# Altium PCB Full_Bridge_Converter.PcbDoc (part 1 of 3)
Units mm, origin at the board's own origin, x right, y up, seen from the top; angles counter-clockwise.
Board outline 225.68 x 119 mm, 4 copper layers (Top Layer, GND, PWD, Bottom Layer), stack 2.398 mm thick; 171 components, 54 nets, 388 pads, 114 vias.
Unrouted connection lines stored in the file: 10.
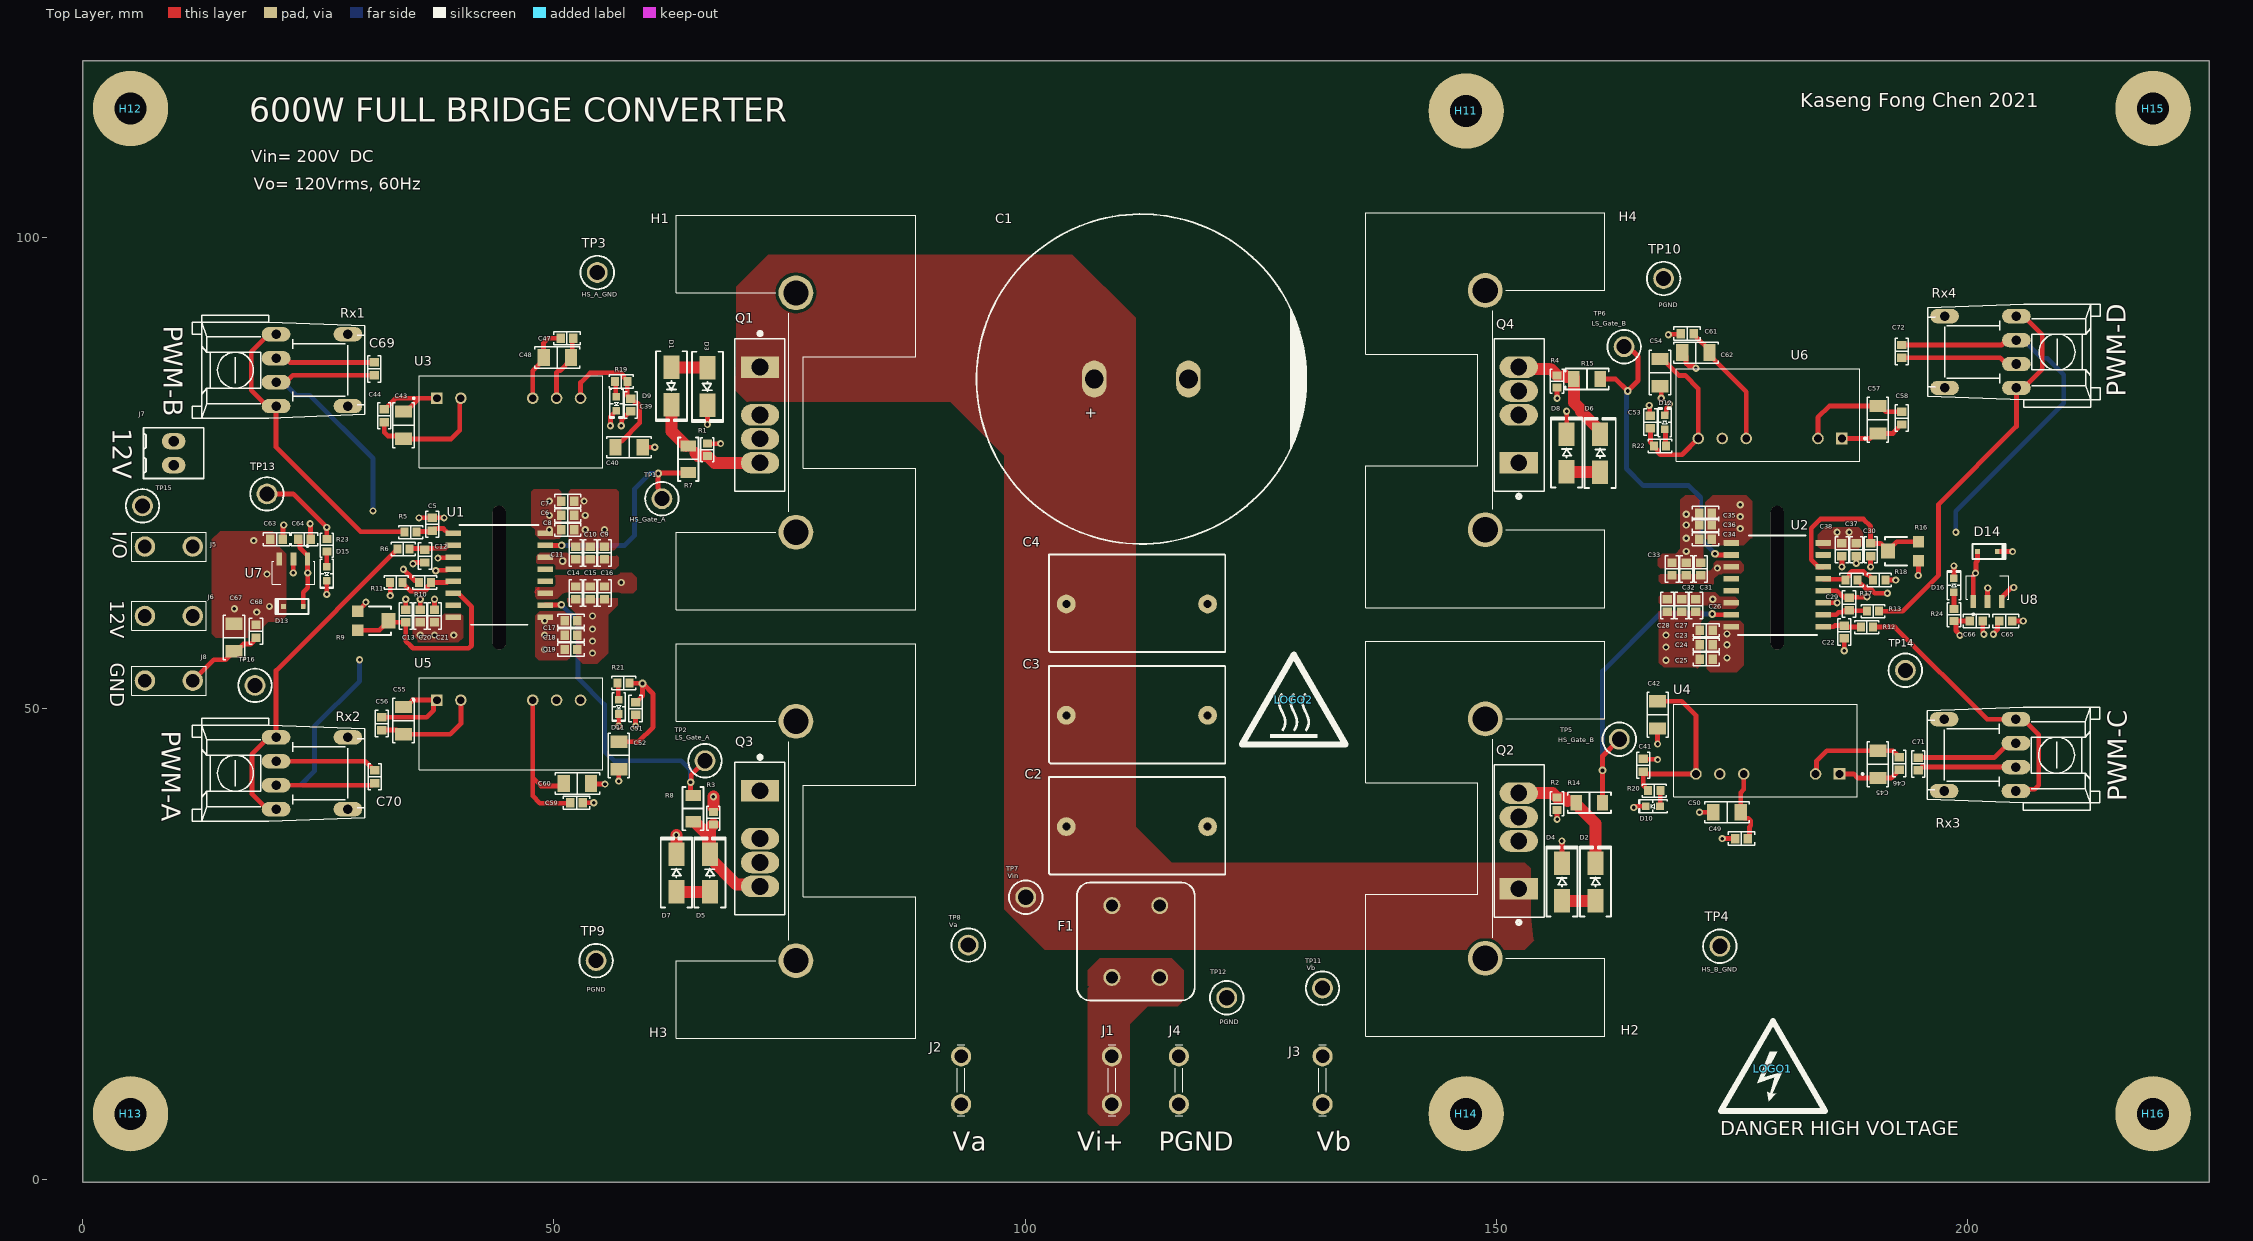
[diagram p0: Top Layer view]
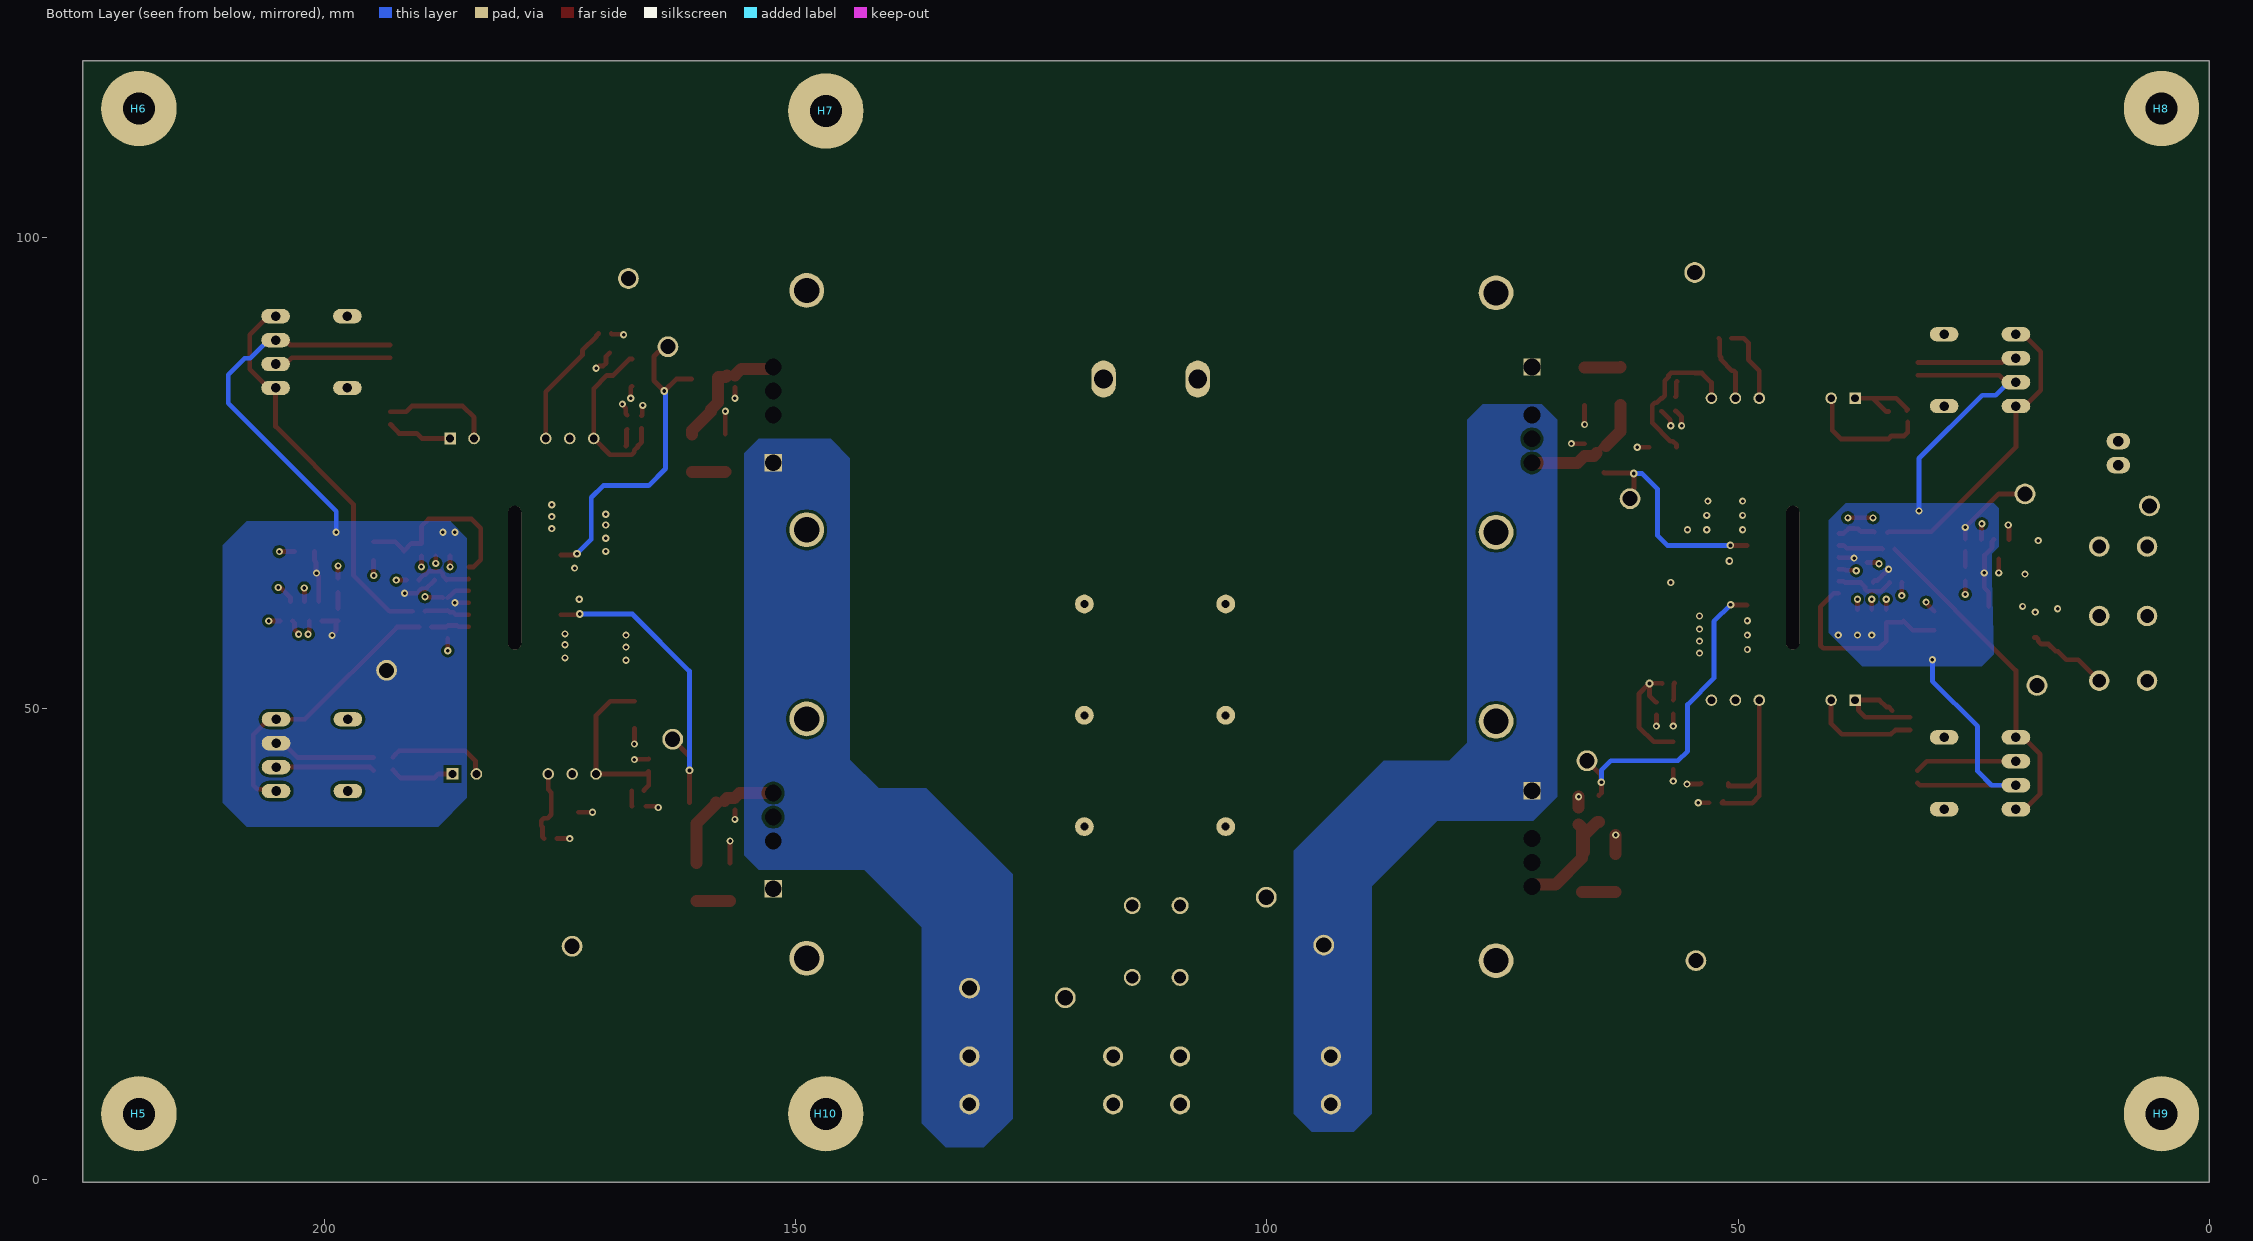
[diagram p1: Bottom Layer view, seen from below]
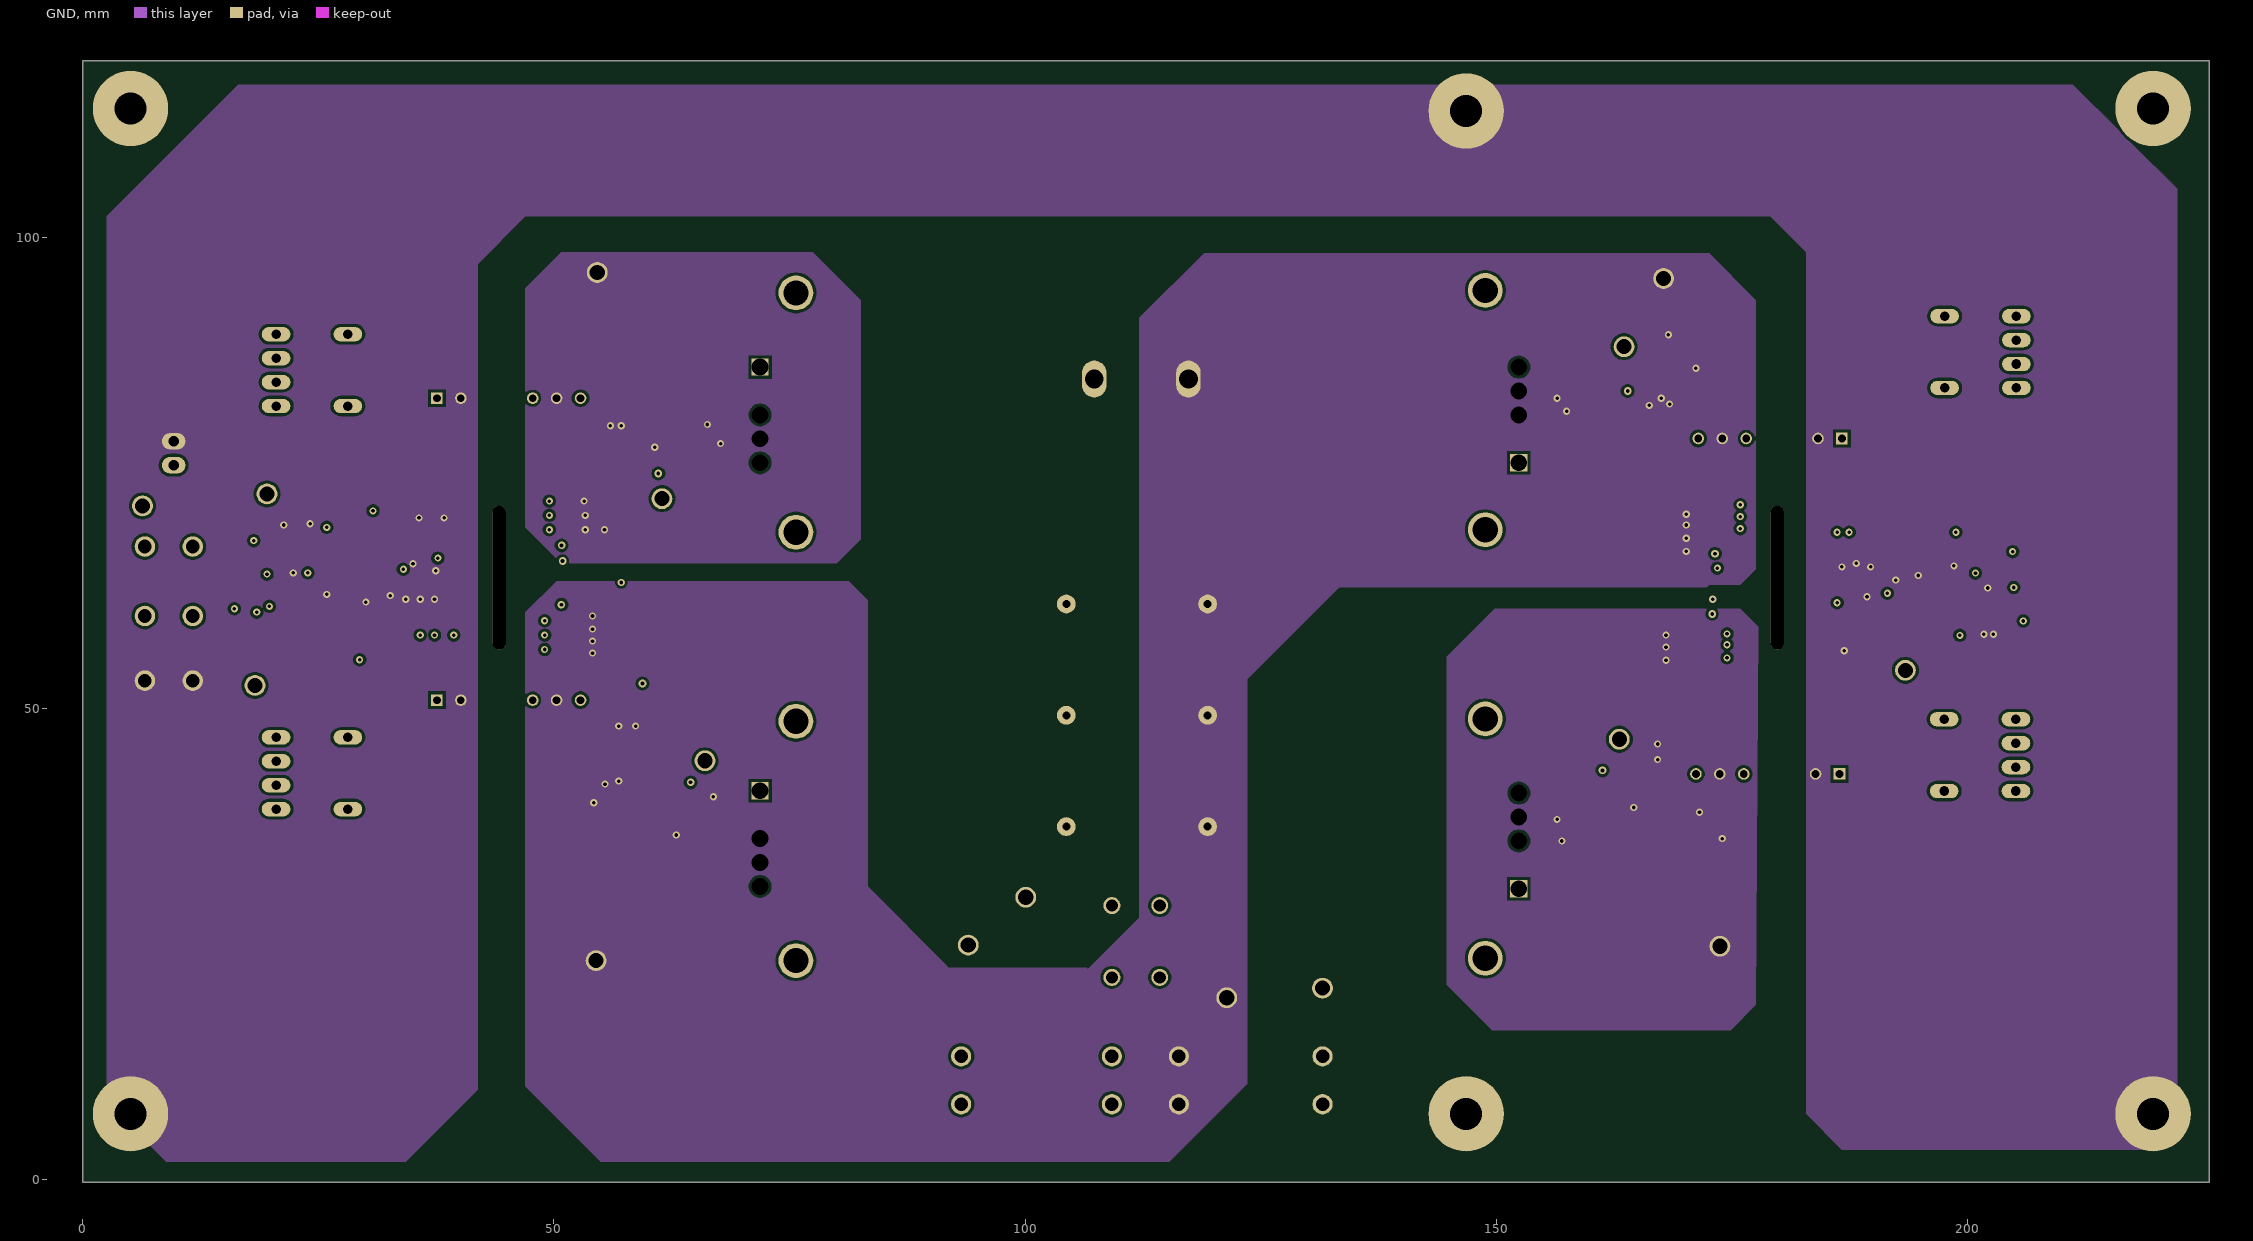
[diagram p2: GND]
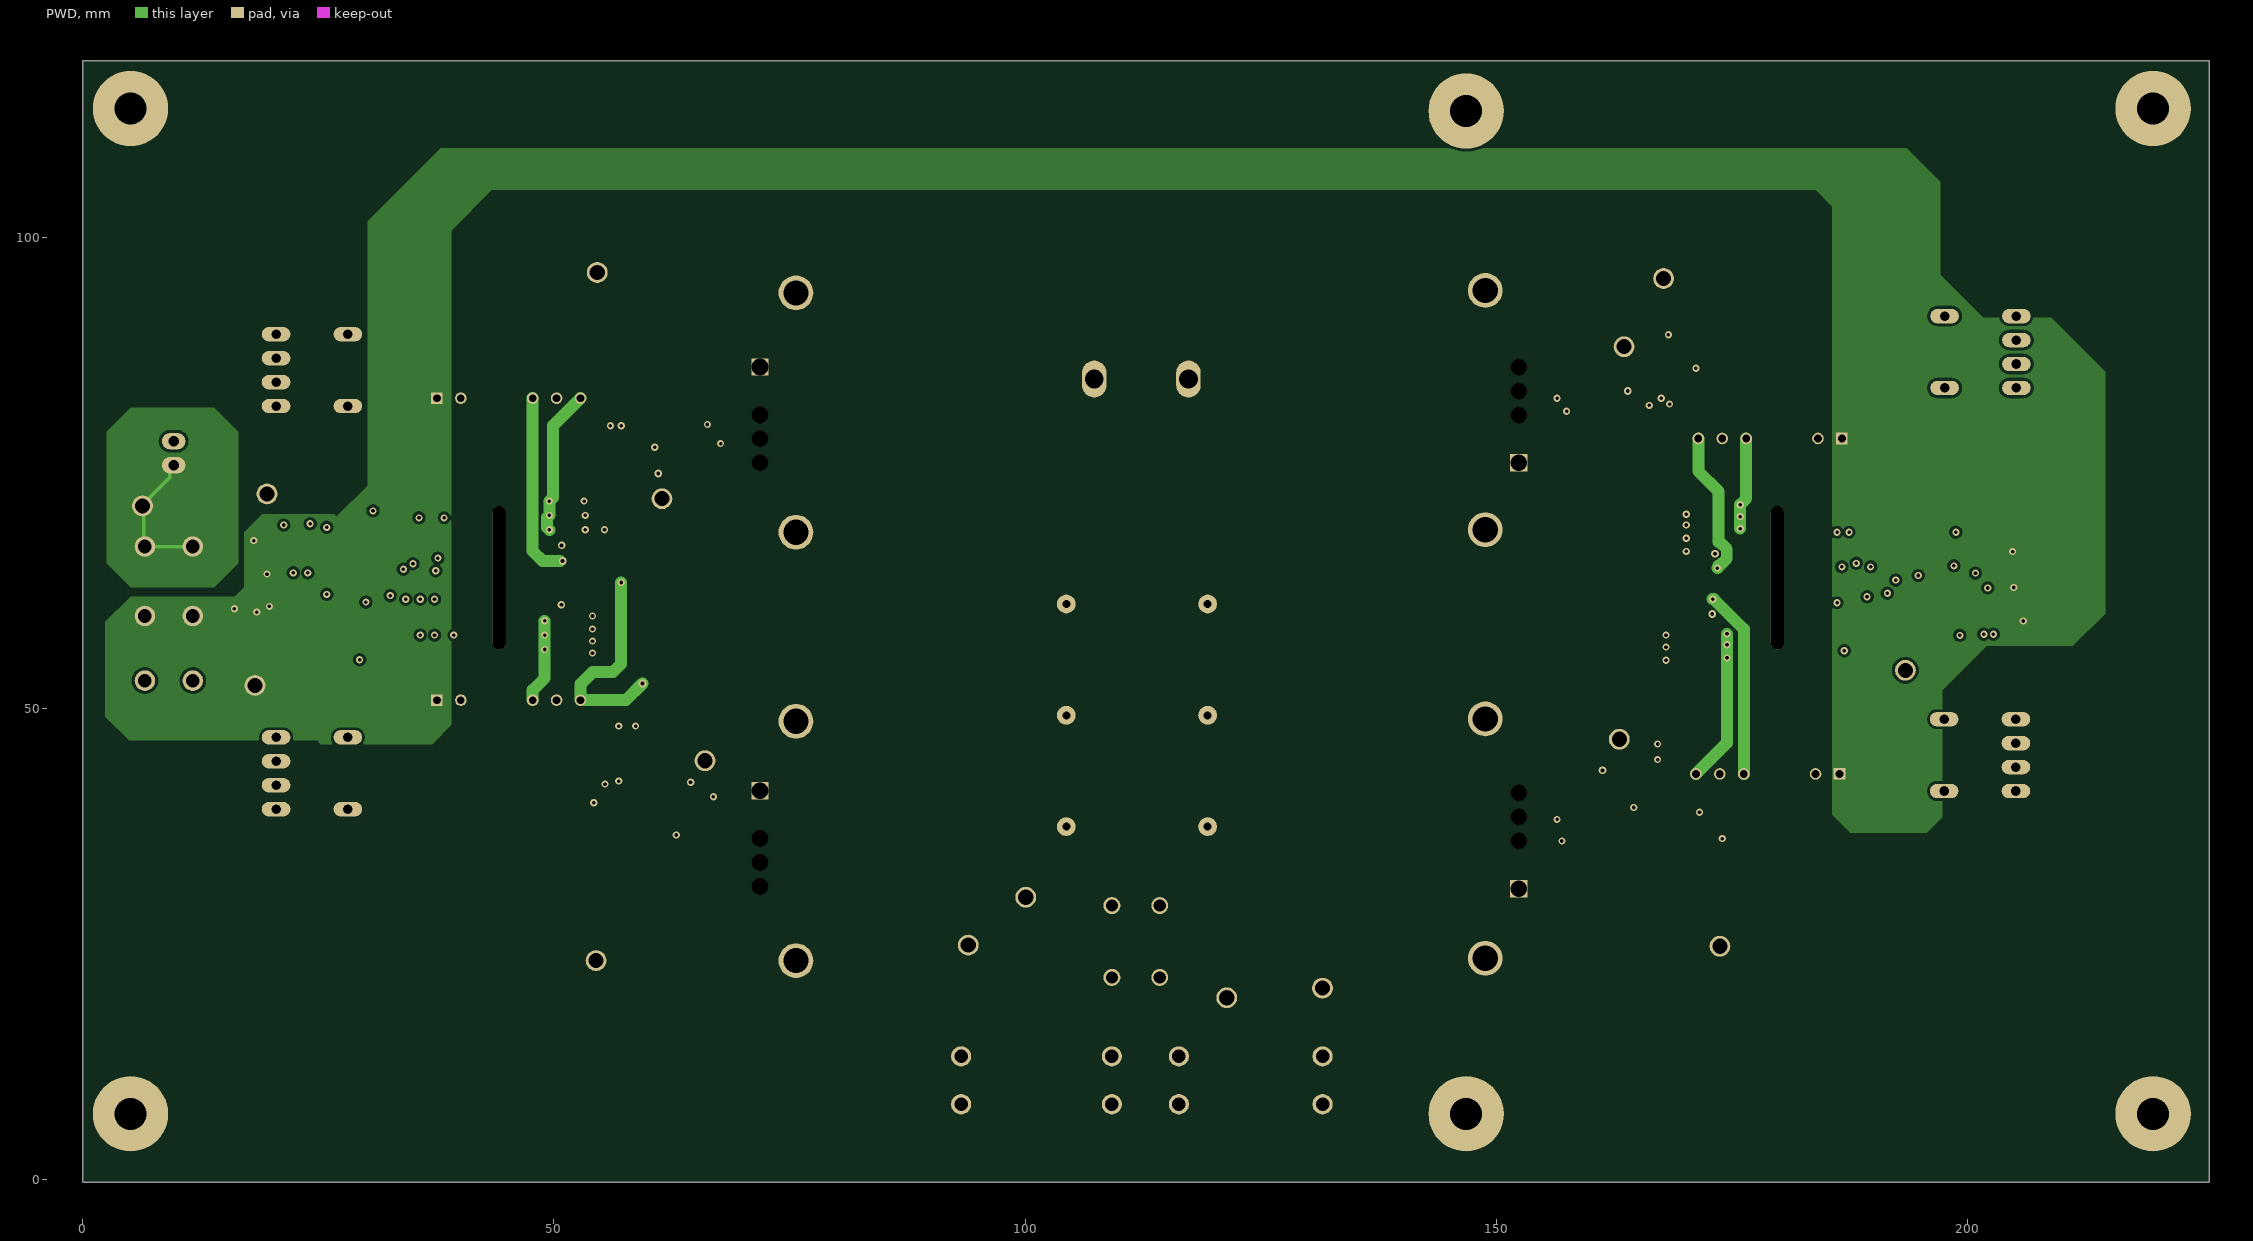
[diagram p3: PWD]
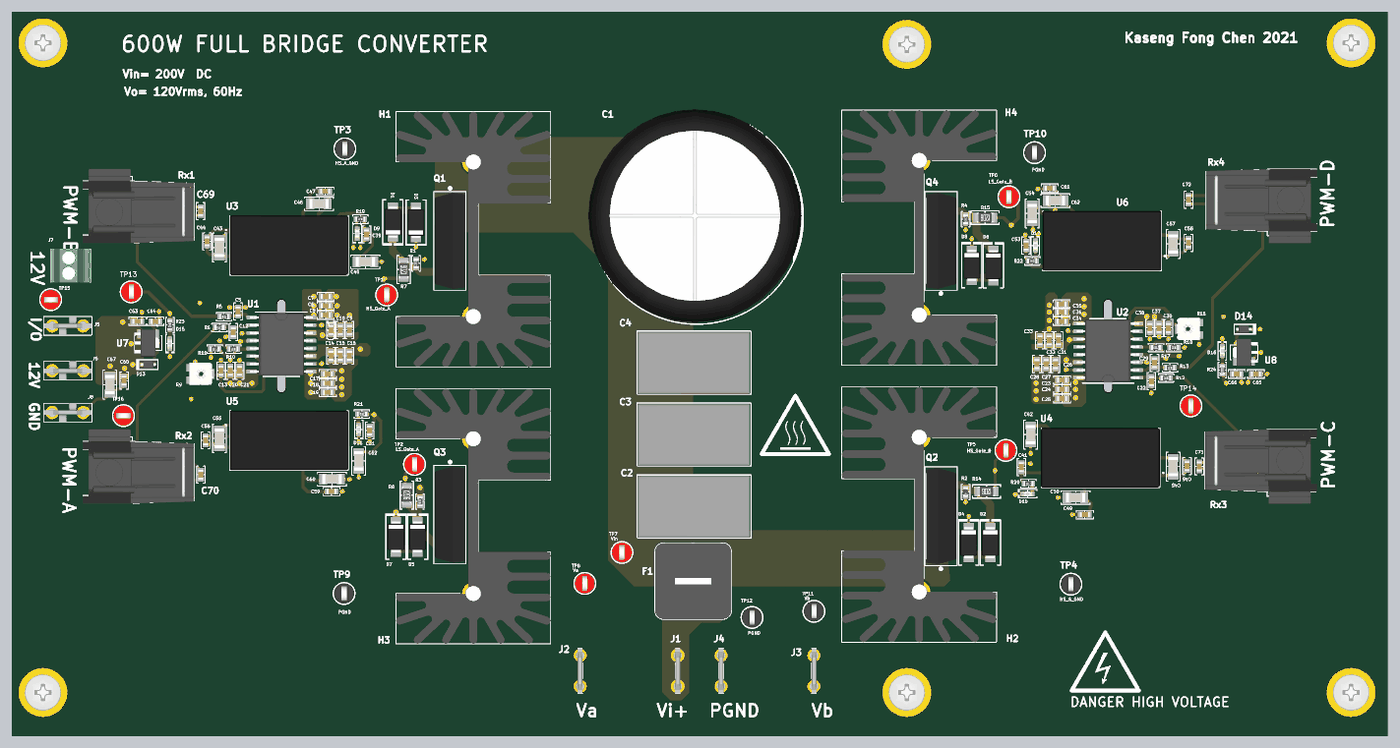
[diagram p5: 3D render of the assembled board from above, using the file's embedded part models]

## Layer stack, top to bottom
Top Solder: solder mask 0.0102, Solder Resist, Dk 3.5
Top Layer: signal copper 0.0711
Dielectric 2: prepreg 0.3048, FR-4-High Tg, Dk 4.1
GND: signal copper 0.0711
Dielectric 1: core 1.5037, FR-4-High Tg, Dk 4.8
PWD: signal copper 0.0711
Dielectric 3: prepreg 0.3048, FR-4-High Tg, Dk 4.1
Bottom Layer: signal copper 0.0711
Bottom Solder: solder mask 0.0102, Solder Resist, Dk 3.5

## Board outline
0,-0.254 225.679,-0.254 225.679,118.745 0,118.745

## Design rules (kind name [scope] priority, off if disabled: settings)
AcuteAngle [All] p1: minimum=4.50000000000000E+0001 checktracksonly=FALSE
AssemblyTestPointUsage [All] p1: valid=2
BoardOutlineClearance BoardOutlineClearance_MountingHoles [OnCopper and InComponentClass('Mounting Holes')] p1: gap=1.016 ignorepadtopadclearanceinfootprint=FALSE
BoardOutlineClearance BoardOutlineClearance_Poly [OnCopper and IsPoly] p2: gap=0.635 ignorepadtopadclearanceinfootprint=FALSE
BoardOutlineClearance [OnCopper and Not InComponentClass('Logo') and not InComponentClass('FiducialMark') and not InRegion(1000,500,4000,800) and not InPoly] p3: gap=0 ignorepadtopadclearanceinfootprint=FALSE
Clearance Clearance_MH [InPadClass('mh')] p1: gap=1.5 ignorepadtopadclearanceinfootprint=FALSE except(0: Arc-Hole Track-Hole SMDPad-Hole THPad-Hole Via-Hole Fill-Hole Poly-Hole Region-Hole Text-Hole)
Clearance Clearance_HV_Bottom_Layer [InLayerClass('Bottom_Layer') and InPolygon vs InNetClass('HV_Class')] p2: gap=3 ignorepadtopadclearanceinfootprint=FALSE except(0: Arc-Hole Track-Hole SMDPad-Hole THPad-Hole Via-Hole Fill-Hole Poly-Hole Region-Hole Text-Hole)
Clearance Clearance_HV_TOP_Layer [InLayerClass('Top_Layer') and InPolygon vs InNetClass('HV_Class')] p3: gap=3 ignorepadtopadclearanceinfootprint=FALSE except(0: Arc-Hole Track-Hole SMDPad-Hole THPad-Hole Via-Hole Fill-Hole Poly-Hole Region-Hole Text-Hole)
Clearance Clearance_HV_PwrLayer [InLayerClass('PWR Class') and InPolygon vs InNetClass('HV_Class')] p4: gap=3 ignorepadtopadclearanceinfootprint=FALSE except(0: Arc-Hole Track-Hole SMDPad-Hole THPad-Hole Via-Hole Fill-Hole Poly-Hole Region-Hole Text-Hole)
Clearance Clearance_HV_GndLayer [InLayerClass('GND_Layer') and InPolygon vs InNetClass('HV_Class')] p5: gap=1.524 ignorepadtopadclearanceinfootprint=FALSE except(0: Arc-Hole Track-Hole SMDPad-Hole THPad-Hole Via-Hole Fill-Hole Poly-Hole Region-Hole Text-Hole)
Clearance "Clearance_Poly to Poly" [InPoly vs InPoly] p6: gap=0.635 ignorepadtopadclearanceinfootprint=FALSE except(0: Arc-Hole Track-Hole SMDPad-Hole THPad-Hole Via-Hole Fill-Hole Poly-Hole Region-Hole Text-Hole)
Clearance Clearance_Poly [InPolygon] p7: gap=0.305 ignorepadtopadclearanceinfootprint=FALSE except(0: Arc-Hole Track-Hole SMDPad-Hole THPad-Hole Via-Hole Fill-Hole Poly-Hole Region-Hole Text-Hole)
Clearance [All] p8: gap=0.2 ignorepadtopadclearanceinfootprint=FALSE except(0: Arc-Hole Track-Hole SMDPad-Hole THPad-Hole Via-Hole Fill-Hole Poly-Hole Region-Hole Text-Hole)
ComponentClearance ComponentClearance_MountingHoles_FiducialMarks [InComponentClass('Mounting Holes') vs InComponentClass('FiducialMark')] p1: gap=0.762 collisioncheckmode=3 verticalgap=0.254 showdistances=FALSE
ComponentClearance ComponentClearance_Shunt [InComponentClass('Header') vs InComponentClass('Shunt')] p2: gap=0 collisioncheckmode=3 verticalgap=0 showdistances=FALSE
ComponentClearance ComponentClearance_Logo [InComponentClass('Logo')] p3: gap=0.025 collisioncheckmode=3 verticalgap=0.025 showdistances=FALSE
ComponentClearance ComponentClearance_ScrewToNut [(HasFootprint('NY PMS 440 0025 PH')) vs (HasFootprint('Keystone_1902C'))] p4: gap=0.025 collisioncheckmode=3 verticalgap=0.025 showdistances=FALSE
ComponentClearance ComponentClearance_MountingHoles [InComponentClass('Mounting Holes')] p5: gap=0.762 collisioncheckmode=3 verticalgap=2540 showdistances=FALSE
ComponentClearance ComponentClearance_SmallPassives [HasFootprint('0201*') or HasFootprint('0402*') or HasFootprint('0508') or HasFootprint('0603*') or HasFootprint('0612') or HasFootprint('0805*') or HasFootprint('0815*') or HasFootprint('0830*') or HasFootprint('1206*') or HasFootprint('1210*') or HasFootprint('1808*') or HasFootprint('1812*') or HasFootprint('1825*') or HasFootprint('2010*') or HasFootprint('2220*') or HasFootprint('2225*') or HasFootprint('2512*') or HasFootprint('2728*') or HasFootprint('3518*') vs HasFootprint('0201*') or HasFootprint('0402*') or HasFootprint('0508') or HasFootprint('0603*') or HasFootprint('0612') or HasFootprint('0805*') or HasFootprint('0815*') or HasFootprint('0830*') or HasFootprint('1206*') or HasFootprint('1210*') or HasFootprint('1808*') or HasFootprint('1812*') or HasFootprint('1825*') or HasFootprint('2010*') or HasFootprint('2220*') or HasFootprint('2225*') or HasFootprint('2512*') or HasFootprint('2728*') or HasFootprint('3518*')] p6: gap=0 collisioncheckmode=3 verticalgap=0 showdistances=FALSE
ComponentClearance ComponentClearance_THtoSMT [IsThruComponent vs IsSMTComponent] p7: gap=0 collisioncheckmode=3 verticalgap=0 showdistances=FALSE
ComponentClearance ComponentClearance_THtoTH [IsThruComponent vs IsThruComponent] p8: gap=0 collisioncheckmode=3 verticalgap=0 showdistances=FALSE
ComponentClearance [All] p9: gap=0 collisioncheckmode=3 verticalgap=0 showdistances=FALSE
DiffPairsRouting [All] p1: maxlimit=0.254 minlimit=0.2 mostfreqgap=0.2 toplayer_minwidth=0.254 toplayer_maxwidth=0.254 toplayer_prefwidth=0.254 midlayer1_minwidth=0.254 midlayer1_maxwidth=0.254 midlayer1_prefwidth=0.254 midlayer2_minwidth=0.254 midlayer2_maxwidth=0.254 midlayer2_prefwidth=0.254 bottomlayer_minwidth=0.254 bottomlayer_maxwidth=0.254 bottomlayer_prefwidth=0.254 maxuncoupledlength=25.4
FabricationTestPointUsage TestPointUsage [All] p1: valid=2 allowmultiple=FALSE
FabricationTestpoint Testpoint [All] p1: side=3 testpointundercomponent=TRUE minsize=1.016 maxsize=2.54 preferedsize=1.524 minholesize=0 maxholesize=1.016 preferedholesize=0.813 testpointgrid=0.025 allowsidetop=TRUE allowsidebottom=TRUE usegrid=TRUE gridtolerance=0
FanoutControl Fanout_LCC [IsLCC] p1: bgadir=Out bgaviamode=Centered fanoutstyle=Auto fanoutdirection=Alternating viagrid=0.025 // Fanout_LCC (Default Rule)
FanoutControl Fanout_BGA [IsBGA] p2: bgadir=Out bgaviamode=Centered fanoutstyle=Auto fanoutdirection=Alternating viagrid=0.025 // Fanout_BGA (Default Rule)
FanoutControl Fanout_Default [All] p4: bgadir=Out bgaviamode=Centered fanoutstyle=Auto fanoutdirection=Alternating viagrid=0.025 // Fanout_Default (Default Rule)
FanoutControl Fanout_Small [(CompPinCount < 5)] p5: bgadir=Out bgaviamode=Centered fanoutstyle=Auto fanoutdirection=OutThenIn viagrid=0.025 // Fanout_Small (Default Rule)
Height [All] p1: minheight=0 maxheight=63.5 prefheight=12.7
HoleSize [All] p1: absolutevalues=TRUE maxlimit=25.4 minlimit=0.2 maxpercent=80.000 minpercent=20.000
MinimumAnnularRing MinimumAnnularRing_ThermalPadVias [IsVia and InAnyComponent] p1: minimumring=0.15
MinimumAnnularRing [All] p2: minimumring=0.14
MinimumSolderMaskSliver MinimumSolderMaskSliver_Logo [InComponentClass('Logo') vs InComponentClass('Logo')] p1: minsoldermaskwidth=0.018
MinimumSolderMaskSliver [All] p2: minsoldermaskwidth=0.1
PlaneConnect [All] p1: planeconnectstyle=Direct reliefexpansion=0.254 reliefentries=4 reliefconductorwidth=0.254 reliefairgap=0.254
PolygonConnect [All] p1: connectstyle=Direct reliefconductorwidth=0.254 reliefentries=4 polygonreliefangle="90 Angle" airgapwidth=0.254
RoutingVias ThermalPadVias [IsVia and InAnyComponent] p1: holewidth=0.2 width=0.5 viastyle="Through Hole" minholewidth=0.2 minwidth=0.5 maxholewidth=0.33 maxwidth=0.6
RoutingVias [All] p2: holewidth=0.406 width=0.813 viastyle="Through Hole" minholewidth=0.305 minwidth=0.61 maxholewidth=0.711 maxwidth=1.321
SilkToSilkClearance SilkToSilkClearance_Pb-FreeLogo [(HasFootprint('Pb-Free_Overlay_Medium') OR HasFootprint('Pb-Free_Overlay_Small')) vs (HasFootprint('Pb-Free_Overlay_Medium') OR HasFootprint('Pb-Free_Overlay_Small'))] p1: silktosilkclearance=0
SilkToSilkClearance [All] p2: silktosilkclearance=0.102
SilkToSolderMaskClearance SilkToComponentPadClearance [(IsPad or IsFill or IsRegion) and InAnycomponent] p1: minsilkscreentomaskgap=0.127 clearancetoexposedcopper=TRUE
SilkToSolderMaskClearance "Silk to Solder Mask Opening" [All] p2: minsilkscreentomaskgap=0.102 clearancetoexposedcopper=FALSE
SolderMaskExpansion [All] p1: expansion=0.05 istentingtop=FALSE
Width [All] p1: maxlimit=2.54 minlimit=0.229 preferedwidth=0.508 checkconnectedcopper=TRUE
15 further rules are at their usual default settings.

## Classes and differential pairs
component class Hardware: H5 H6 H7 H8 H9 H10 H11 H12 H13 H14 H15 H16 LOGO1 LOGO2
component class PowerSupply: C39 C40 C41 C42 C43 C44 C45 C46 C47 C48 C49 C50 C51 C52 C53 C54 C55 C56 C57 C58 C59 C60 C61 C62 C63 C64 C65 C66 C67 C68 D9 D10 D11 D12 D13 D14 D15 D16 J5 J6 J7 J8 R19 R20 R21 R22 R23 R24 TP3 TP4 TP9 TP10 TP13 TP14 TP15 TP16 U3 U4 U5 U6 U7 U8
component class Power_Card: C1 C2 C3 C4 D1 D2 D3 D4 D5 D6 D7 D8 F1 H1 H2 H3 H4 J1 J2 J3 J4 Q1 Q2 Q3 Q4 R1 R2 R3 R4 TP7 TP8 TP11 TP12
component class Optic_PWM: C69 C70 C71 C72 Rx1 Rx2 Rx3 Rx4
component class Gate_Driver: C5 C6 C7 C8 C9 C10 C11 C12 C13 C14 C15 C16 C17 C18 C19 C20 C21 C22 C23 C24 C25 C26 C27 C28 C29 C30 C31 C32 C33 C34 C35 C36 C37 C38 R5 R6 R7 R8 R9 R10 R11 R12 R13 R14 R15 R16 R17 R18 TP1 TP2 TP5 TP6 U1 U2

## Components (designator, comment, footprint, x,y, rotation, side; value= is the part's Value field where it differs from the comment)
C1 "470µF" "CAP TH ALUM ELEC D35.00mm S10.00mm H40.00mm" 112.348,84.963 r180 top
C2 "220nF" R75PI32204030J 111.88,37.465 r0 top
C3 "220nF" R75PI32204030J 111.88,49.276 r0 top
C4 "220nF" R75PI32204030J 111.88,61.087 r0 top
C5 "100pF" "CAP 0603_1608" 37.084,69.556 r270 top
C6 "1µF" "CAP 0603_1608" 51.475,70.485 r180 top
C7 "0.1µF" "CAP 0603_1608" 51.475,72.009 r180 top
C8 "10000pF" "CAP 0603_1608" 51.475,68.961 r180 top
C9 "1µF" "CAP 0603_1608" 55.372,66.508 r90 top
C10 "0.1µF" "CAP 0603_1608" 53.848,66.508 r90 top
C11 "10000pF" "CAP 0603_1608" 52.324,66.508 r90 top
C12 "100pF" "CAP 0603_1608" 36.322,66.167 r90 top
C13 "0.22µF" "CAP 0603_1608" 34.29,59.817 r270 top
C14 "1µF" "CAP 0603_1608" 52.324,62.27 r90 top
C15 "0.1µF" "CAP 0603_1608" 53.848,62.27 r90 top
C16 "10000pF" "CAP 0603_1608" 55.372,62.27 r90 top
C17 "1µF" "CAP 0603_1608" 51.816,59.309 r0 top
C18 "0.1µF" "CAP 0603_1608" 51.816,57.785 r0 top
C19 "10000pF" "CAP 0603_1608" 51.816,56.261 r0 top
C20 "1µF" "CAP 0603_1608" 35.814,59.817 r270 top
C21 "0.1µF" "CAP 0603_1608" 37.338,59.817 r270 top
C22 "100pF" "CAP 0603_1608" 186.944,58.126 r90 top
C23 "1µF" "CAP 0603_1608" 172.299,58.293 r0 top
C24 "0.1µF" "CAP 0603_1608" 172.299,56.769 r0 top
C25 "10000pF" "CAP 0603_1608" 172.299,55.245 r0 top
C26 "1µF" "CAP 0603_1608" 171.196,60.92 r270 top
C27 "0.1µF" "CAP 0603_1608" 169.672,60.92 r270 top
C28 "10000pF" "CAP 0603_1608" 168.148,60.92 r270 top
C29 "100pF" "CAP 0603_1608" 187.452,61.087 r270 top
C30 "0.22µF" "CAP 0603_1608" 189.738,66.842 r90 top
C31 "1µF" "CAP 0603_1608" 171.704,64.81 r270 top
C32 "0.1µF" "CAP 0603_1608" 170.18,64.81 r270 top
C33 "10000pF" "CAP 0603_1608" 168.656,64.81 r270 top
C34 "1µF" "CAP 0603_1608" 172.212,67.945 r180 top
C35 "0.1µF" "CAP 0603_1608" 172.212,70.739 r180 top
C36 "10000pF" "CAP 0603_1608" 172.212,69.469 r180 top
C37 "1µF" "CAP 0603_1608" 188.214,66.842 r90 top
C38 "0.1µF" "CAP 0603_1608" 186.69,66.842 r90 top
C39 "1µF" "CAP 0603_1608" 58.166,82.21 r90 top
C40 "10µF" "CAP 1206_3216 - 1.8MM" 57.986,77.724 r180 top
C41 "1µF" "CAP 0603_1608" 165.608,43.982 r270 top
C42 "10µF" "CAP 1206_3216 - 1.8MM" 167.132,49.329 r90 top
C43 "4.7µF" "CAP 1206_3216 - 1.8MM" 34.036,80.063 r90 top
C44 "0.1µF" "CAP 0603_1608" 32.004,81.066 r90 top
C45 "4.7µF" "CAP 1206_3216 - 1.8MM" 190.5,44.069 r270 top
C46 "0.1µF" "CAP 0603_1608" 192.786,44.156 r270 top
C47 "1µF" "CAP 0603_1608" 51.395,89.281 r0 top
C48 "10µF" "CAP 1206_3216 - 1.8MM" 50.366,87.249 r0 top
C49 "1µF" "CAP 0603_1608" 176.022,36.195 r180 top
C50 "10µF" "CAP 1206_3216 - 1.8MM" 174.498,38.989 r180 top
C51 "1µF" "CAP 0603_1608" 58.674,49.998 r90 top
C52 "10µF" "CAP 1206_3216 - 1.8MM" 56.896,45.011 r90 top
C53 "1µF" "CAP 0603_1608" 166.37,80.391 r270 top
C54 "10µF" "CAP 1206_3216 - 1.8MM" 167.386,85.651 r90 top
C55 "4.7µF" "CAP 1206_3216 - 1.8MM" 34.036,48.715 r90 top
C56 "0.1µF" "CAP 0603_1608" 31.75,48.387 r90 top
C57 "4.7µF" "CAP 1206_3216 - 1.8MM" 190.5,80.645 r270 top
C58 "0.1µF" "CAP 0603_1608" 193.04,80.812 r270 top
C59 "1µF" "CAP 0603_1608" 52.411,40.005 r0 top
C60 "10µF" "CAP 1206_3216 - 1.8MM" 52.504,42.037 r0 top
C61 "1µF" "CAP 0603_1608" 170.267,89.789 r180 top
C62 "10µF" "CAP 1206_3216 - 1.8MM" 171.196,87.757 r180 top
C63 "1µF" "CAP 0603_1608" 20.574,67.945 r180 top
C64 "1µF" "CAP 0603_1608" 23.535,67.945 r180 top
C65 "1µF" "CAP 0603_1608" 204.078,59.284 r0 top
C66 "1µF" "CAP 0603_1608" 200.95,59.284 r180 top
C67 "4.7µF" "CAP 1206_3216 - 1.8MM" 16.066,57.531 r90 top
C68 "0.1µF" "CAP 0603_1608" 18.39,58.191 r90 top
C69 "0.1µF" "CAP 0603_1608" 30.937,86.044 r270 top
C70 "0.1µF" "CAP 0603_1608" 30.988,42.759 r270 top
C71 "0.1µF" "CAP 0603_1608" 194.793,44.109 r90 top
C72 "0.1µF" "CAP 0603_1608" 193.04,87.899 r90 top
D1 "SMAJ5.0A" "DO214AC SMA" 62.484,84.233 r270 top
D2 "SMAJ5.0A" "DO214AC SMA" 160.528,31.591 r90 top
D3 "SMAJ16A" "DO214AC SMA" 66.294,84.169 r270 top
D4 "SMAJ16A" "DO214AC SMA" 156.972,31.591 r90 top
D5 "SMAJ5.0A" "DO214AC SMA" 66.548,32.544 r90 top
D6 "SMAJ5.0A" "DO214AC SMA" 161.036,77.089 r90 top
D7 "SMAJ16A" "DO214AC SMA" 62.992,32.544 r90 top
D8 "SMAJ16A" "DO214AC SMA" 157.48,77.121 r90 top
D9 "Green" "LED 0603_1608 GREEN" 56.642,82.334 r270 top
D10 "Green" "LED 0603_1608 GREEN" 166.636,39.624 r180 top
D11 "Green" "LED 0603_1608 GREEN" 56.896,50.165 r270 top
D12 "Green" "LED 0603_1608 GREEN" 167.894,80.379 r90 top
D13 "PMEG6010CEJ,115" SOD-323F 22.352,60.833 r0 top
D14 "PMEG6010CEJ,115" SOD-323F 202.133,66.65 r180 top
D15 "Green" "LED 0603_1608 GREEN" 25.908,64.289 r270 top
D16 "Green" "LED 0603_1608 GREEN" 198.577,63.082 r90 top
F1 "3101.0040" SCHURTER_3101_0040 111.76,25.273 r180 top
H1 "Disipador de 3.3.C/W" HSINK_6399BG 75.692,81.407 r270 top
H2 "Disipador de 3.3.C/W" HSINK_6399BG 148.844,36.195 r90 top
H3 "Disipador de 3.3.C/W" HSINK_6399BG 75.692,35.941 r270 top
H4 "Disipador de 3.3.C/W" HSINK_6399BG 148.844,81.661 r90 top
H5 "24438" Keystone24438 219.71,6.985 r0 bottom
H6 "24438" Keystone24438 219.71,113.665 r0 bottom
H7 "24438" Keystone24438 146.812,113.411 r0 bottom
H8 "24438" Keystone24438 5.08,113.665 r0 bottom
H9 "24438" Keystone24438 5.08,6.985 r0 bottom
H10 "24438" Keystone24438 146.812,6.985 r0 bottom
H11 "MPMS 003 0005 PH" BuildingFastener_MPMS_003_0005_PH 146.812,113.411 r180 top
H12 "MPMS 003 0005 PH" BuildingFastener_MPMS_003_0005_PH 5.08,113.665 r180 top
H13 "MPMS 003 0005 PH" BuildingFastener_MPMS_003_0005_PH 5.08,6.985 r180 top
H14 "MPMS 003 0005 PH" BuildingFastener_MPMS_003_0005_PH 146.812,6.985 r180 top
H15 "MPMS 003 0005 PH" BuildingFastener_MPMS_003_0005_PH 219.71,113.665 r180 top
H16 "MPMS 003 0005 PH" BuildingFastener_MPMS_003_0005_PH 219.71,6.985 r180 top
J1 "Faston  .250" TE_62409-1 109.22,10.541 r270 top
J2 "Faston  .250" TE_62409-1 93.218,10.541 r270 top
J3 "Faston  .250" TE_62409-1 131.572,10.541 r270 top
J4 "Faston  .250" TE_62409-1 116.332,10.541 r270 top
J5 "Faston .183" TE_1217133-1 9.144,67.183 r180 top
J6 "Faston .183" TE_1217133-1 9.144,59.817 r180 top
J7 "282834-2" "TE 282834-2" 9.652,77.089 r90 top
J8 "Faston .183" TE_1217133-1 9.144,52.959 r180 top
LOGO1 "DANGER HIGH VOLTAGE" IEC_HighVoltage_Medium 179.375,11.76 r0 top
LOGO2 "CAUTION HOT SURFACE" IEC_HotSurface_Medium 128.524,50.927 r0 top
Q1 "C3M0045065K" TO-247-4L_C3M0075120K_WFS 71.882,86.233 r270 top
Q2 "C3M0045065K" TO-247-4L_C3M0075120K_WFS 152.4,30.861 r90 top
Q3 "C3M0045065K" TO-247-4L_C3M0075120K_WFS 71.882,41.275 r270 top
Q4 "C3M0045065K" TO-247-4L_C3M0075120K_WFS 152.4,76.073 r90 top
R1 "20 k" "RES 0603_1608" 66.294,77.455 r270 top
R2 "20 k" "RES 0603_1608" 156.464,39.893 r90 top
R3 "20 k" "RES 0603_1608" 66.929,38.354 r270 top
R4 "20 k" "RES 0603_1608" 156.464,84.709 r90 top
R5 "0 Ohms" "RES 0603_1608" 34.798,68.707 r0 top
R6 "0 Ohms" "RES 0603_1608" 34.036,66.929 r0 top
R7 "2.7 Ohms" "RES 1206_3216" 64.262,76.451 r90 top
R8 "2.7 Ohms" "RES 1206_3216" 64.77,39.373 r270 top
R9 "20k" "POT BOURNS TRIMPOT TC33" 30.988,59.309 r270 top
R10 "5.1 kOhms" "RES 0603_1608" 36.322,63.373 r180 top
R11 "5.1 kOhms" "RES 0603_1608" 33.274,63.373 r0 top
R12 "0 Ohms" "RES 0603_1608" 189.342,58.634 r180 top
R13 "0 Ohms" "RES 0603_1608" 189.992,60.325 r180 top
R14 "2.7 Ohms" "RES 1206_3216" 159.89,40.005 r180 top
R15 "2.7 Ohms" "RES 1206_3216" 159.642,84.963 r180 top
R16 "20 kOhms" "POT BOURNS TRIMPOT TC33" 193.018,66.691 r90 top
R17 "5.1 kOhms" "RES 0603_1608" 187.706,63.627 r0 top
R18 "5.1 kOhms" "RES 0603_1608" 190.642,63.627 r180 top
R19 "10 kOhms" "RES 0603_1608" 57.15,84.709 r180 top
R20 "10 kOhms" "RES 0603_1608" 166.766,41.275 r0 top
R21 "10 kOhms" "RES 0603_1608" 57.404,52.705 r180 top
R22 "10 kOhms" "RES 0603_1608" 167.386,77.851 r0 top
R23 "10 kOhms" "RES 0603_1608" 25.908,67.325 r270 top
R24 "10 kOhms" "RES 0603_1608" 198.577,59.934 r90 top
Rx1 "HFBR-2531Z" HFBR-15X1V 29.921,85.903 r90 top
Rx2 "HFBR-2531Z" HFBR-15X1V 29.921,43.129 r90 top
Rx3 "HFBR-2531Z" HFBR-15X1V 195.758,45.053 r270 top
Rx4 "HFBR-2531Z" HFBR-15X1V 195.809,87.827 r270 top
TP1 "5010" Keystone5010 61.468,72.263 r180 top
TP2 "5010" Keystone5010 66.04,44.45 r180 top
TP3 "5011" Keystone5011 54.61,96.266 r180 top
TP4 "5011" Keystone5011 173.736,24.765 r180 top
TP5 "5010" Keystone5010 163.068,46.736 r180 top
TP6 "5010" Keystone5010 163.576,88.392 r180 top
TP7 "5010" Keystone5010 100.076,29.972 r180 top
TP8 "5010" Keystone5010 93.98,24.892 r180 top
TP9 "5011" Keystone5011 54.483,23.241 r180 top
TP10 "5011" Keystone5011 167.767,95.631 r180 top
TP11 "5011" Keystone5011 131.572,20.32 r180 top
TP12 "5011" Keystone5011 121.412,19.304 r180 top
TP13 "5010" Keystone5010 19.558,72.771 r180 top
TP14 "5010" Keystone5010 193.421,54.051 r0 top
TP15 "5010" Keystone5010 6.35,71.501 r90 top
TP16 "5010" Keystone5010 18.288,52.451 r90 top
U1 "UCC21530QDWKRQ1" DW0016B_HV 44.196,64.135 r0 top
U2 "UCC21530QDWKRQ1" DW0016B_HV 179.832,63.119 r180 top
U3 "R15P21503D" CONV_R15P21503D 45.442,80.431 r0 top
U4 "R15P21503D" CONV_R15P21503D 178.586,45.553 r180 top
U5 "R15P21503D" CONV_R15P21503D 45.442,48.387 r0 top
U6 "R15P21503D" CONV_R15P21503D 178.84,81.153 r180 top
U7 "L78L05ACUTR" VREG_L78L12ABUTR 22.352,64.389 r270 top
U8 "L78L05ACUTR" VREG_L78L12ABUTR 202.133,62.84 r90 top

## Footprints (in the part's own frame and the unit in brackets; to place one, negate y for a bottom-side part, rotate by r counter-clockwise, add the part's x,y. Pads: shape width x height; smd on the part's side, far side on the other; paste and mask are expansions set on the pad)
BuildingFastener_MPMS_003_0005_PH [mil] "MACHINE SCREW PAN PHILLIPS M3"
  round 1 on Mech3: 0(0,0)
  body extent -118,-118 118,118, height 93
"CAP 0603_1608" [mm] "Chip Capacitor, 2-Leads, Body 1.60x0.80mm, IPC Medium Density"
  rect 0.9x1 smd: 1(-0.675,0) 2(0.675,0)
  silkscreen extent -1.4,-0.7 1.4,0.7, body extent -0.8,-0.41 0.8,0.41, height 0.82
"CAP 1206_3216 - 1.8MM" [mm] "Chip Capacitor, 2-Leads, Body 3.25x1.60mm, IPC Medium Density"
  rect 1.3x1.8 smd: 1(-1.45,0) 2(1.45,0)
  silkscreen extent -2.37,-1.12 2.37,1.12, body extent -1.6,-0.8 1.6,0.8, height 1.8
"CAP TH ALUM ELEC D35.00mm S10.00mm H40.00mm" [mm] "35mm Diameter 10mm Lead Spacing Aluminum Electrolytic Capacitors Radial, Can , Snap-In"
  oval 2.6x3.9 hole 2: 1(5,0) 2(-5,0)
  silkscreen extent -17.5,-17.5 17.5,17.5, body extent -17.21,-17.8 17.8,17.2, height 40
CONV_R15P21503D [mm]
  rect 1.23x1.23 hole 0.82: 1(-7.85,2.5)
  round 1.23 hole 0.82: 2(-5.31,2.5) 5(2.31,2.5) 6(4.85,2.5) 7(7.39,2.5)
  silkscreen extent -10.4,-4.9 9.75,4.9, body extent -9.75,-4.91 9.75,4.9, height 12.01
"DO214AC SMA" [mm] "Molded Diode, 2-Leads, Body 4.30x2.60mm, IPC Medium Density"
  rect 2.5x1.7 smd: 1(-2,0) 2(2,0)
  silkscreen extent -3.68,-1.65 3.75,1.65, body extent -2.6,-1.37 2.6,1.37, height 2.4
DW0016B_HV [mm]
  rrect17% 1.65x0.6 smd: 1(-4.875,4.445) 2(-4.875,3.175) 3(-4.875,1.905) 4(-4.875,0.635) 5(-4.875,-0.635) 6(-4.875,-1.905) 7(-4.875,-3.175) 8(-4.875,-4.445) 9(4.875,-4.445) 10(4.875,-3.175) 11(4.875,-1.905) 12(4.875,-0.635) 13(4.875,0.635) 14(4.875,1.905) 15(4.875,3.175) 16(4.875,4.445)
  silkscreen extent -4.23,-5.25 4.19,5.33, body extent -5.14,-5.13 5.14,5.13, height 2.5
HFBR-15X1V [mil]
  oval 60x120 hole 40: 1(150,370) 2(50,370) 3(-50,370) 4(-150,370) 5(-150,70) 8(150,70)
  silkscreen extent -200,0 230,720, body extent -202,2 279,722, height 740
HSINK_6399BG [mm]
  round 3.686 hole 2.67: 1(-12.7,0) 2(12.7,0)
  silkscreen extent -20.96,-12.7 20.96,12.7, body extent -20.95,-12.7 20.96,12.7, height 50.81
IEC_HighVoltage_Medium [mm]
  silkscreen extent -5.51,-4.46 5.51,5.09
IEC_HotSurface_Medium [mm]
  silkscreen extent -5.51,-4.76 5.51,4.78
Keystone5010 [mil]
  round 87 hole 63: 1(0,0)
  silkscreen extent -70,-70 70,70, body extent -63,-63 63,62, height 319
Keystone5011 [mil]
  round 87 hole 63: 1(0,0)
  silkscreen extent -70,-70 70,70, body extent -63,-63 63,62, height 319
Keystone24438 [mil] "Standoff, Aluminium, M3x0.5mm, L 25 mm"
  round 1 on Mech3: 0(0,0)
  body extent -98,-114 98,114, height 984
"LED 0603_1608 GREEN" [mm] "Chip Diode, 2-Leads, Body 1.60x0.80mm, IPC Medium Density"
  rect 0.8x0.8 smd: 1(-0.75,0) 2(0.75,0)
  silkscreen extent -1.52,-0.7 1.52,0.7, body extent -0.8,-0.4 0.8,0.4, height 0.53
"POT BOURNS TRIMPOT TC33" [mm] "Bourns Trimpot TC33X-1 - Open Frame 3mm x 3.8mm x 1.2mm"
  rect 1.2x1.2 smd: 1(-1,-1.8) 3(1,-1.8)
  rect 1.6x1.5 smd: 2(0,1.45)
  silkscreen extent -1.5,-0.6 1.5,1.75, body extent -1.8,-1.91 1.8,1.95, height 1.15
R75PI32204030J [mm] "KEMET Film capacitor"
  round 2 hole 0.85 paste+0 mask+0: 1(-7.5,0) 2(7.5,0)
  silkscreen extent -9.33,-5.1 9.38,5.25, body extent -9.25,-5.08 9.25,5.13, height 16.11
"RES 0603_1608" [mm] "Chip Resistor, 2-Leads, Body 1.60x0.80mm, IPC Medium Density"
  rect 0.85x0.95 smd: 1(-0.65,0) 2(0.65,0)
  silkscreen extent -1.27,-0.7 1.27,0.7, body extent -0.8,-0.4 0.8,0.4, height 0.45
"RES 1206_3216" [mm] "Chip Resistor, 2-Leads, Body 3.13x1.55mm, IPC Medium Density"
  rect 1.2x1.65 smd: 1(-1.4,0) 2(1.4,0)
  silkscreen extent -2.3,-1.1 2.3,1.1, body extent -1.6,-0.8 1.6,0.8, height 0.6
SCHURTER_3101_0040 [mm] "Fuse Holder, Body 12.5x12.5mm, TH"
  round 1.8 hole 1.3: 1(-2.54,3.81) 2(2.54,3.81) 3(2.54,-3.81) 4(-2.54,-3.81)
  silkscreen extent -6.25,-6.25 6.25,6.25, body extent -6.25,-6.25 6.25,6.25, height 32.6
SOD-323F [mm]
  rect 0.5x0.5 smd: 1(-1.05,0) 2(1.05,0)
  silkscreen extent -1.9,-0.8 1.6,0.8, body extent -1.25,-0.62 1.25,0.63, height 0.81
"TE 282834-2" [mm]
  oval 1.75x2.5 hole 1.1: 1(-1.27,0) 2(1.27,0)
  silkscreen extent -2.7,-3.2 2.7,3.2, body extent -2.77,-3.25 2.77,3.25, height 10
TE_62409-1 [mm]
  round 2.145 hole 1.43: 1(-2.54,0) 1(2.54,0)
  silkscreen extent -3.75,-0.4 3.75,0.4, body extent -3.75,-0.4 3.75,0.4, height 12.64
TE_1217133-1 [mm]
  round 2.175 hole 1.45: 1(-2.54,0) 1(2.54,0)
  silkscreen extent -3.96,-1.54 3.96,1.54, body extent -3.96,-1.54 3.96,1.54, height 8.9
TO-247-4L_C3M0075120K_WFS [mm]
  rect 2.29x4.06 / inner rect 1.829x1.829 / far side rect 1.829x1.829 hole 1.78 mask+0: 1(0,0)
  oval 2.29x4.06 / inner round 1.575 / far side round 1.575 hole 1.78 mask+0: 2(5.08,0) 3(7.62,0) 4(10.16,0)
  silkscreen extent -3.76,-2.68 13.18,2.61, body extent -2.82,-2.55 12.98,2.45, height 25.13
VREG_L78L12ABUTR [mm]
  rect 1.4x0.57 smd: 1(-1.475,1.5) 3(-1.475,-1.5)
  rect 1.4x0.65 smd paste-2 mask+0: 2(-1.475,0)
  silkscreen extent -2.95,-2.25 1.22,2.25, body extent -2.25,-2.27 2.25,1.83, height 1.6

## Part data
C1: library part ESMQ451VSN471MA40S, "CAP ALUM 470UF 20% 450V SNAP", Device Package="Radial, Can - Snap-In", Lifetime @ Temp.="2000 Hrs @ 85°C", Manufacturer="United Chemi-Con", Operating Temperature="-25°C ~ 85°C", Ripple Current @ High Frequency="3.618A @ 50kHz", Ripple Current @ Low Frequency="2.53A @ 120Hz", Supplier Part Number 1=565-2798-ND, Tolerance=±20%, Voltage - Rated=450V, Applications="General Purpose", Capacitance=470µF, ComponentLink1Description=Datasheet, ComponentLink1URL=http://www.chemi-con.co.jp/cgi-bin/CAT_DB/SEARCH/cat_db_al.cgi?e=e&j=p&pdfname=smqlug, ComponentLink2Description="DigiKey Link", ComponentLink2URL=http://digikey.com/product-detail/en/united-chemi-con/ESMQ451VSN471MA40S/565-2798-ND/758010, Height - Seated (Max)="1.575\" (40.00mm)", LastUpdated="13/9/2020 09:22:08", Lead Spacing="0.394\" (10.00mm)", Lifecycle Status=Active, Minimum Order=1, Mounting Type="Through Hole", Package / Case="Radial, Can - Snap-In", Packaging=Bulk, Part Number=ESMQ451VSN471MA40S, Part Status=Active, PartId=26446, Polarization=Polar, Price=5.99, Series=SMQ, Size / Dimension="1.378\" Dia (35.00mm)", Supplier 1=DigiKey
C2 C3 C4: library part R75PI32204030J, "KEMET         R75PI32204030J            Film Capacitor, AEC-Q200 R75 Series, 0.22 F,  5%, PP (Polypropylene), 630 V", Case/Package=Radial, Dielectric=PP, Manufacturer=KEMET, Max Operating Temperature=105°C, Min Operating Temperature=-55°C, Supplier Part Number 1=399-12761-ND, Tolerance=5%, Voltage=630V, Voltage Rating (AC)=250V, Capacitance=220nF, Category="Film Capacitors", ComponentLink1Description=http://www.alliedelec.com/m/d/0659d349de7ca29105b1b70da899f791.pdf?src-supplier=Allied+Electronics, ComponentLink1URL=http://www.alliedelec.com/m/d/0659d349de7ca29105b1b70da899f791.pdf?src-supplier=Allied+Electronics, ComponentLink2Description=http://www.farnell.com/datasheets/2120989.pdf?src-supplier=Farnell, ComponentLink2URL=http://www.farnell.com/datasheets/2120989.pdf?src-supplier=Farnell, ComponentLink3Description=http://www.kemet.com/docfinder?Partnumber=R75PI32204030J&src-supplier=Digi-Key, ComponentLink3URL=http://www.kemet.com/docfinder?Partnumber=R75PI32204030J&src-supplier=Digi-Key, ComponentLink4Description=http://www.farnell.com/datasheets/2068064.pdf?src-supplier=Element14, ComponentLink4URL=http://www.farnell.com/datasheets/2068064.pdf?src-supplier=Element14, Depth=10mm, Dielectric Material=PP, Dissipation Factor=0.05%, Height=16mm, Height - Seated (Max)=0.634inch, Lead Diameter=0.8mm, Lead Length=30mm, Lead Pitch=15mm, Length=0.709inch, Manufacturer Part Number=R75PI32204030J, Mount="Through Hole", Packaging=Bulk, Pricing 1="1=0,95000, 10=0,72000, 50=0,59800, 100=0,51490, 500=0,39860, 1000=0,34324, 2500=0,32110, 5000=0,31002 (USD)", REACH SVHC="No SVHC", RoHS=Yes, RoHS Compliant=Yes, Stock 1=488, Supplier 1=Digi-Key, Termination="PC Pins", Voltage Rating=630V, Voltage Rating (DC)=630V, Width=0.394inch
C5 C12 C22 C29: library part GCM1885C2A101JA16D, "CAP CER 100PF 100V C0G/NP0 0603", Device Package="0603 (1608 Metric)", Manufacturer="Murata Electronics", Operating Temperature="-55°C ~ 125°C", Ratings=AEC-Q200, Supplier Part Number 1=490-4771-1-ND, Temperature Coefficient="C0G, NP0", Tolerance=±5%, Voltage - Rated=100V, Applications=Automotive, Capacitance=100pF, ComponentLink1Description=Datasheet, ComponentLink1URL=https://psearch.en.murata.com/capacitor/product/GCM1885C2A101JA16%23.pdf, ComponentLink2Description="DigiKey Link", ComponentLink2URL=http://digikey.com/product-detail/en/murata-electronics/GCM1885C2A101JA16D/490-4771-1-ND/1641690, LastUpdated="2/9/2020 01:03:33", Lifecycle Status=Active, Minimum Order=1, Mounting Type="Surface Mount, MLCC", Package / Case="0603 (1608 Metric)", Packaging=TapeAndReel, Part Number=GCM1885C2A101JA16D, Part Status=Active, PartId=3835, Price=0.02, Series=GCM, Size / Dimension="0.063\" L x 0.031\" W (1.60mm x 0.80mm)", Supplier 1=DigiKey, Thickness (Max)="0.035\" (0.90mm)"
C6 C9 C14 C17 C20 C23 C26 C31 C34 C37 C39 C41 C47 C49 C51 C53 C59 C61: library part UMK107AB7105KA-T, "CAP CER 1UF 50V X7R 0603", Device Package="0603 (1608 Metric)", Manufacturer="Taiyo Yuden", Operating Temperature="-55°C ~ 125°C", Supplier Part Number 1=587-3247-1-ND, Temperature Coefficient=X7R, Tolerance=±10%, Voltage - Rated=50V, Applications="General Purpose", Capacitance=1µF, ComponentLink1Description=Datasheet, ComponentLink1URL=https://www.yuden.co.jp/productdata/catalog/mlcc01_e.pdf, ComponentLink2Description="DigiKey Link", ComponentLink2URL=http://digikey.com/product-detail/en/taiyo-yuden/UMK107AB7105KA-T/587-3247-1-ND/3660107, LastUpdated="2/9/2020 01:03:17", Lifecycle Status=Active, Minimum Order=1, Mounting Type="Surface Mount, MLCC", Package / Case="0603 (1608 Metric)", Packaging=TapeAndReel, Part Number=UMK107AB7105KA-T, Part Status=Active, PartId=12796, Price=0.05, Series=M, Size / Dimension="0.063\" L x 0.031\" W (1.60mm x 0.80mm)", Supplier 1=DigiKey, Thickness (Max)="0.037\" (0.95mm)"
C7 C10 C15 C18 C24 C27 C32 C35 C44 C46 C56 C58 C68 C69 C70 C71 C72: library part C0603C104M5RACTU, "CAP CER 0.1UF 50V X7R 0603", Device Package="0603 (1608 Metric)", Manufacturer=KEMET, Operating Temperature="-55°C ~ 125°C", Supplier Part Number 1=399-7845-1-ND, Temperature Coefficient=X7R, Tolerance=±20%, Voltage - Rated=50V, Applications="Bypass, Decoupling", Capacitance=0.1µF, ComponentLink1Description=Datasheet, ComponentLink1URL=https://api.kemet.com/component-edge/download/datasheet/C0603C104M5RACTU.pdf, ComponentLink2Description="DigiKey Link", ComponentLink2URL=http://digikey.com/product-detail/en/kemet/C0603C104M5RACTU/399-7845-1-ND/3471568, LastUpdated="2/9/2020 01:03:01", Lifecycle Status=Active, Minimum Order=1, Mounting Type="Surface Mount, MLCC", Package / Case="0603 (1608 Metric)", Packaging=TapeAndReel, Part Number=C0603C104M5RACTU, Part Status=Active, PartId=17854, Price=0.01, Series="SMD Comm X7R", Size / Dimension="0.063\" L x 0.031\" W (1.60mm x 0.80mm)", Supplier 1=DigiKey, Thickness (Max)="0.034\" (0.87mm)"
C8 C11 C16 C19 C25 C28 C33 C36: library part CGA3E2C0G1H103J080AA, "CAP CER 10000PF 50V C0G 0603", Device Package="0603 (1608 Metric)", Manufacturer="TDK Corporation", Operating Temperature="-55°C ~ 125°C", Ratings=AEC-Q200, Supplier Part Number 1=445-6916-1-ND, Temperature Coefficient="C0G, NP0", Tolerance=±5%, Voltage - Rated=50V, Applications=Automotive, Capacitance=10000pF, ComponentLink1Description=Datasheet, ComponentLink1URL=https://product.tdk.com/info/en/catalog/datasheets/mlcc_automotive_general_en.pdf?ref_disty=digikey, ComponentLink2Description="DigiKey Link", ComponentLink2URL=http://digikey.com/product-detail/en/tdk-corporation/CGA3E2C0G1H103J080AA/445-6916-1-ND/2672934, LastUpdated="2/9/2020 01:03:33", Lifecycle Status=Active, Minimum Order=1, Mounting Type="Surface Mount, MLCC", Package / Case="0603 (1608 Metric)", Packaging=TapeAndReel, Part Number=CGA3E2C0G1H103J080AA, Part Status=Active, PartId=4079, Price=0.06, Series=CGA, Size / Dimension="0.063\" L x 0.031\" W (1.60mm x 0.80mm)", Supplier 1=DigiKey, Thickness (Max)="0.035\" (0.90mm)"
C13 C30: library part GRM188R71E224KA88J, "CAP CER 0.22UF 25V X7R 0603", Device Package="0603 (1608 Metric)", Manufacturer="Murata Electronics", Operating Temperature="-55°C ~ 125°C", Supplier Part Number 1=490-11522-1-ND, Temperature Coefficient=X7R, Tolerance=±10%, Voltage - Rated=25V, Applications="General Purpose", Capacitance=0.22µF, ComponentLink1Description=Datasheet, ComponentLink1URL=https://www.murata.com/~/media/webrenewal/support/library/catalog/products/capacitor/mlcc/c02e.ashx?la=en-us, ComponentLink2Description="DigiKey Link", ComponentLink2URL=http://digikey.com/product-detail/en/murata-electronics/GRM188R71E224KA88J/490-11522-1-ND/5333362, LastUpdated="2/9/2020 01:03:21", Lifecycle Status=Active, Minimum Order=1, Mounting Type="Surface Mount, MLCC", Package / Case="0603 (1608 Metric)", Packaging=TapeAndReel, Part Number=GRM188R71E224KA88J, Part Status=Active, PartId=10549, Price=0.03, Series=GRM, Size / Dimension="0.063\" L x 0.031\" W (1.60mm x 0.80mm)", Supplier 1=DigiKey, Thickness (Max)="0.035\" (0.90mm)"
C21 C38: library part CGA3E2X7R1E104K080AA, "CAP CER 0.1UF 25V X7R 0603", Device Package="0603 (1608 Metric)", Manufacturer="TDK Corporation", Operating Temperature="-55°C ~ 125°C", Ratings=AEC-Q200, Supplier Part Number 1=445-5667-1-ND, Temperature Coefficient=X7R, Tolerance=±10%, Voltage - Rated=25V, Applications=Automotive, Capacitance=0.1µF, ComponentLink1Description=Datasheet, ComponentLink1URL=https://product.tdk.com/info/en/catalog/datasheets/mlcc_automotive_general_en.pdf?ref_disty=digikey, ComponentLink2Description="DigiKey Link", ComponentLink2URL=http://digikey.com/product-detail/en/tdk-corporation/CGA3E2X7R1E104K080AA/445-5667-1-ND/2443707, LastUpdated="2/9/2020 01:03:30", Lifecycle Status=Active, Minimum Order=1, Mounting Type="Surface Mount, MLCC", Package / Case="0603 (1608 Metric)", Packaging=TapeAndReel, Part Number=CGA3E2X7R1E104K080AA, Part Status=Active, PartId=5534, Price=0.01, Series=CGA, Size / Dimension="0.063\" L x 0.031\" W (1.60mm x 0.80mm)", Supplier 1=DigiKey, Thickness (Max)="0.035\" (0.90mm)"
C40 C42 C48 C50 C52 C54 C60 C62: library part TMK316AB7106KL-T, "CAP CER 10UF 25V X7R 1206", Device Package="1206 (3216 Metric)", Manufacturer="Taiyo Yuden", Operating Temperature="-55°C ~ 125°C", Supplier Part Number 1=587-3486-1-ND, Temperature Coefficient=X7R, Tolerance=±10%, Voltage - Rated=25V, Applications="General Purpose", Capacitance=10µF, ComponentLink1Description=Datasheet, ComponentLink1URL=https://www.yuden.co.jp/productdata/catalog/mlcc01_e.pdf, ComponentLink2Description="DigiKey Link", ComponentLink2URL=http://digikey.com/product-detail/en/taiyo-yuden/TMK316AB7106KL-T/587-3486-1-ND/4157519, LastUpdated="2/9/2020 01:05:40", Lifecycle Status=Active, Minimum Order=1, Mounting Type="Surface Mount, MLCC", Package / Case="1206 (3216 Metric)", Packaging=TapeAndReel, Part Number=TMK316AB7106KL-T, Part Status=Active, PartId=20052, Price=0.08, Series=M, Size / Dimension="0.126\" L x 0.063\" W (3.20mm x 1.60mm)", Supplier 1=DigiKey, Thickness (Max)="0.071\" (1.80mm)"
C43 C45 C55 C57 C67: library part UMK316AB7475KL-T, "CAP CER 4.7UF 50V X7R 1206", Device Package="1206 (3216 Metric)", Manufacturer="Taiyo Yuden", Operating Temperature="-55°C ~ 125°C", Supplier Part Number 1=587-2994-1-ND, Temperature Coefficient=X7R, Tolerance=±10%, Voltage - Rated=50V, Applications="General Purpose", Capacitance=4.7µF, ComponentLink1Description=Datasheet, ComponentLink1URL=https://www.yuden.co.jp/productdata/catalog/mlcc01_e.pdf, ComponentLink2Description="DigiKey Link", ComponentLink2URL=http://digikey.com/product-detail/en/taiyo-yuden/UMK316AB7475KL-T/587-2994-1-ND/2714187, LastUpdated="2/9/2020 01:05:40", Lifecycle Status=Active, Minimum Order=1, Mounting Type="Surface Mount, MLCC", Package / Case="1206 (3216 Metric)", Packaging=TapeAndReel, Part Number=UMK316AB7475KL-T, Part Status=Active, PartId=20094, Price=0.08, Series=M, Size / Dimension="0.126\" L x 0.063\" W (3.20mm x 1.60mm)", Supplier 1=DigiKey, Thickness (Max)="0.071\" (1.80mm)"
C63 C65: library part TMK107B7105KA-T, "CAP CER 1UF 25V X7R 0603", Device Package="0603 (1608 Metric)", Manufacturer="Taiyo Yuden", Operating Temperature="-55°C ~ 125°C", Supplier Part Number 1=587-2984-1-ND, Temperature Coefficient=X7R, Tolerance=±10%, Voltage - Rated=25V, Applications="General Purpose", Capacitance=1µF, ComponentLink1Description=Datasheet, ComponentLink1URL=https://www.yuden.co.jp/productdata/catalog/mlcc01_e.pdf, ComponentLink2Description="DigiKey Link", ComponentLink2URL=http://digikey.com/product-detail/en/taiyo-yuden/TMK107B7105KA-T/587-2984-1-ND/2714177, LastUpdated="2/9/2020 01:03:30", Lifecycle Status=Active, Minimum Order=1, Mounting Type="Surface Mount, MLCC", Package / Case="0603 (1608 Metric)", Packaging=TapeAndReel, Part Number=TMK107B7105KA-T, Part Status=Active, PartId=5586, Price=0.01, Series=M, Size / Dimension="0.063\" L x 0.031\" W (1.60mm x 0.80mm)", Supplier 1=DigiKey, Thickness (Max)="0.035\" (0.90mm)"
C64 C66: library part CC0603KRX7R7BB105, "CAP CER 1UF 16V X7R 0603", Device Package="0603 (1608 Metric)", Manufacturer=Yageo, Operating Temperature="-55°C ~ 125°C", Supplier Part Number 1=311-1446-1-ND, Temperature Coefficient=X7R, Tolerance=±10%, Voltage - Rated=16V, Applications="General Purpose", Capacitance=1µF, ComponentLink1Description=Datasheet, ComponentLink1URL=https://www.yageo.com/upload/media/product/productsearch/datasheet/mlcc/UPY-GPHC_X7R_6.3V-to-50V_18.pdf, ComponentLink2Description="DigiKey Link", ComponentLink2URL=http://digikey.com/product-detail/en/yageo/CC0603KRX7R7BB105/311-1446-1-ND/2833752, LastUpdated="2/9/2020 01:03:31", Lifecycle Status=Active, Minimum Order=1, Mounting Type="Surface Mount, MLCC", Package / Case="0603 (1608 Metric)", Packaging=TapeAndReel, Part Number=CC0603KRX7R7BB105, Part Status=Active, PartId=5233, Price=0.01, Series=CC, Size / Dimension="0.063\" L x 0.031\" W (1.60mm x 0.80mm)", Supplier 1=DigiKey, Thickness (Max)="0.035\" (0.90mm)"
D1 D2 D5 D6: "BOURNS - SMAJ5.0A - TVS Diode, SMAJ Series, Unidirectional, 5 V, 9.2 V, DO-214AC (SMA), 2 Pins", Breakdown Voltage=7V, Case/Package=DO-214AC, Clamping Voltage=9.2V, Leakage Current=800uA, Manufacturer=Bourns, Max Operating Temperature=150°C, Max Power Dissipation=400W, Max Surge Current=40A, Min Breakdown Voltage=6.4V, Min Operating Temperature=-55°C, Operating Supply Voltage=3.5V, Package Quantity=1, Peak Pulse Current=43.5A, Power Line Protection=No, Resistor Type=Zener, Reverse Standoff Voltage=5V, Supplier Part Number 1=SMAJ5.0ABCT-ND, Test Current=10mA, Category="TVS Diodes", ComponentLink1Description=https://datasheet.ciiva.com/25624/0900766b8112213b-25624680.pdf?src-supplier=RSComponents, ComponentLink1URL=https://datasheet.ciiva.com/25624/0900766b8112213b-25624680.pdf?src-supplier=RSComponents, ComponentLink2Description=https://datasheet.ciiva.com/333/smaj-333521.pdf?src-supplier=Digi-Key, ComponentLink2URL=https://datasheet.ciiva.com/333/smaj-333521.pdf?src-supplier=Digi-Key, ComponentLink3Description=https://datasheet.ciiva.com/333/smaj-333522.pdf?src-supplier=Digi-Key, ComponentLink3URL=https://datasheet.ciiva.com/333/smaj-333522.pdf?src-supplier=Digi-Key, ComponentLink4Description=https://datasheet.ciiva.com/333/smaj-333523.pdf?src-supplier=Digi-Key, ComponentLink4URL=https://datasheet.ciiva.com/333/smaj-333523.pdf?src-supplier=Digi-Key, ComponentLink5Description=https://datasheet.ciiva.com/3021/smaj-3021400.pdf?src-supplier=Avnet, ComponentLink5URL=https://datasheet.ciiva.com/3021/smaj-3021400.pdf?src-supplier=Avnet, ComponentLink6Description=https://datasheet.ciiva.com/30169/smaj-30169929.pdf?src-supplier=Onlinecomponents.com, ComponentLink6URL=https://datasheet.ciiva.com/30169/smaj-30169929.pdf?src-supplier=Onlinecomponents.com, ComponentLink7Description=https://datasheet.ciiva.com/28409/1695388-28409916.pdf?src-supplier=Element14, ComponentLink7URL=https://datasheet.ciiva.com/28409/1695388-28409916.pdf?src-supplier=Element14, Diode Type=ZENER, Direction=Unidirectional, Element Configuration=Single, ESD Protection=Yes, Height=2.42mm, Length=4.57mm, Manufacturer Part Number=SMAJ5.0A, Max Breakdown Voltage=7V, Max Reverse Leakage Current=800uA, Mount="Surface Mount", Number of Channels=1, Number of Elements=1, Number of Pins=2, Number of Unidirectional Channels=1, Packaging="Tape and Reel", Peak Pulse Power=400W, Polarity=Unidirectional, Pricing 1="1=0,49000, 10=0,34300, 100=0,17320, 500=0,14130, 1000=0,10483, 2000=0,08820 (USD)", Radiation Hardening=No, REACH SVHC="No SVHC", Reverse Breakdown Voltage=6.4V, RoHS=Yes, RoHS Compliant=Yes, Series=SMAJ, Stock 1=30981, Supplier 1=Digi-Key, Termination=SMD/SMT, Width=2.92mm
D3 D4 D7 D8: "TVS DIODE 16VWM 26VC DO214AC", Breakdown Voltage=19.7V, Case/Package=DO-214AC, Clamping Voltage=26V, Leakage Current=5uA, Manufacturer=Bourns, Max Operating Temperature=150°C, Max Power Dissipation=400W, Max Surge Current=40A, Min Breakdown Voltage=17.8V, Min Operating Temperature=-55°C, Operating Supply Voltage=3.5V, Package Quantity=1, Peak Pulse Current=15.3A, Power Line Protection=No, Resistor Type=Zener, Reverse Standoff Voltage=16V, Supplier Part Number 1=SMAJ16ABCT-ND, Test Current=1mA, Category="TVS Diodes", ComponentLink1Description=https://datasheet.ciiva.com/3022/smaj-3022194.pdf?src-supplier=Avnet, ComponentLink1URL=https://datasheet.ciiva.com/3022/smaj-3022194.pdf?src-supplier=Avnet, ComponentLink2Description=https://datasheet.ciiva.com/3022/smaj-3022195.pdf?src-supplier=Avnet, ComponentLink2URL=https://datasheet.ciiva.com/3022/smaj-3022195.pdf?src-supplier=Avnet, ComponentLink3Description=https://datasheet.ciiva.com/8031/1695388-8031131.pdf?src-supplier=Element14, ComponentLink3URL=https://datasheet.ciiva.com/8031/1695388-8031131.pdf?src-supplier=Element14, ComponentLink4Description=https://datasheet.ciiva.com/28649/1695388-28649163.pdf?src-supplier=Element14, ComponentLink4URL=https://datasheet.ciiva.com/28649/1695388-28649163.pdf?src-supplier=Element14, ComponentLink5Description=https://datasheet.ciiva.com/333/smaj-333452.pdf?src-supplier=Digi-Key, ComponentLink5URL=https://datasheet.ciiva.com/333/smaj-333452.pdf?src-supplier=Digi-Key, ComponentLink6Description=https://datasheet.ciiva.com/333/smaj-333453.pdf?src-supplier=Digi-Key, ComponentLink6URL=https://datasheet.ciiva.com/333/smaj-333453.pdf?src-supplier=Digi-Key, ComponentLink7Description=https://datasheet.ciiva.com/17413/smaj-17413677.pdf?src-supplier=Avnet+Europe, ComponentLink7URL=https://datasheet.ciiva.com/17413/smaj-17413677.pdf?src-supplier=Avnet+Europe, ComponentLink8Description=https://datasheet.ciiva.com/333/smaj-333454.pdf?src-supplier=Digi-Key, ComponentLink8URL=https://datasheet.ciiva.com/333/smaj-333454.pdf?src-supplier=Digi-Key, ComponentLink9Description=https://datasheet.ciiva.com/16237/smaj-16237406.pdf?src-supplier=Onlinecomponents.com, ComponentLink9URL=https://datasheet.ciiva.com/16237/smaj-16237406.pdf?src-supplier=Onlinecomponents.com, Diode Type=ZENER, Direction=Unidirectional, Element Configuration=Single, Manufacturer Part Number=SMAJ16A, Max Breakdown Voltage=19.7V, Max Reverse Leakage Current=5uA, Mount="Surface Mount", Number of Channels=1, Number of Elements=1, Number of Pins=2, Number of Unidirectional Channels=1, Packaging="Tape and Reel", Peak Pulse Power=400W, Polarity=Unidirectional, Pricing 1="1=0,49000, 10=0,34400, 100=0,17360, 500=0,14160, 1000=0,10505, 2000=0,08838 (USD)", Radiation Hardening=No, REACH SVHC="No SVHC", Reverse Breakdown Voltage=17.8V, RoHS=Yes, RoHS Compliant=Yes, Series=SMAJ, Stock 1=14121, Supplier 1=Digi-Key, Termination=SMD/SMT
D9 D10 D11 D12 D15 D16: library part 150060GS75000, "LED GREEN CLEAR 0603 SMD", Current - Test=20mA, Device Package="0603 (1608 Metric)", Lens Color=Colorless, Manufacturer="Würth Elektronik", Millicandela Rating=430mcd, Supplier Device Package=0603, Supplier Part Number 1=732-4971-1-ND, Voltage - Forward (Vf) (Typ)=3.2V, Color=Green, ComponentLink1Description=Datasheet, ComponentLink1URL=https://katalog.we-online.de/led/datasheet/150060GS75000.pdf, ComponentLink2Description="DigiKey Link", ComponentLink2URL=http://digikey.com/product-detail/en/w-rth-elektronik/150060GS75000/732-4971-1-ND/4489896, Configuration=Standard, Height (Max)=0.80mm, LastUpdated="2/9/2020 01:20:41", Lens Size="1.10mm x 0.70mm", Lens Style="Rectangle with Flat Top", Lens Transparency=Clear, Lifecycle Status=Active, Minimum Order=1, Mounting Type="Surface Mount", Package / Case="0603 (1608 Metric)", Packaging=TapeAndReel, Part Number=150060GS75000, Part Status=Active, PartId=686, Price=0.10, Series=WL-SMCW, Size / Dimension="1.60mm L x 0.80mm W", Supplier 1=DigiKey, Viewing Angle=140°, Wavelength - Dominant=520nm, Wavelength - Peak=515nm
D13 D14: "PMEG6010CEH; PMEG6010CEJ - 1 A very low VF MEGA Schottky barrier rectifiers", Manufacturer=Nexperia, Supplier Part Number 1=1727-3882-1-ND, Category="Rectifier Diodes", ComponentLink1Description=https://www.mouser.com/ds/2/302/PMEG6010CEH_PMEG6010CEJ-102368.pdf?src-supplier=Mouser, ComponentLink1URL=https://www.mouser.com/ds/2/302/PMEG6010CEH_PMEG6010CEJ-102368.pdf?src-supplier=Mouser, ComponentLink2Description=http://www.farnell.com/datasheets/109684.pdf?src-supplier=Farnell, ComponentLink2URL=http://www.farnell.com/datasheets/109684.pdf?src-supplier=Farnell, ComponentLink3Description=http://www.farnell.com/datasheets/109684.pdf?src-supplier=Newark, ComponentLink3URL=http://www.farnell.com/datasheets/109684.pdf?src-supplier=Newark, ComponentLink4Description=https://assets.nexperia.com/documents/data-sheet/PMEG6010CEH_PMEG6010CEJ.pdf?src-supplier=Digi-Key, ComponentLink4URL=https://assets.nexperia.com/documents/data-sheet/PMEG6010CEH_PMEG6010CEJ.pdf?src-supplier=Digi-Key, Manufacturer Part Number=PMEG6010CEJ,115, Pricing 1="1=0,35000, 10=0,27200, 100=0,16340, 500=0,15128, 1000=0,10288 (USD)", RoHS=Yes, Stock 1=105369, Supplier 1=Digi-Key
F1: "Fuse Holder, 400 V, 16 A, TH", Manufacturer=Schurter, Supplier Part Number 1=486-1159-ND, ComponentLink1Description="Datasheet Link", ComponentLink1URL=http://www.schurterinc.com/var/schurter/storage/ilcatalogue/files/document/datasheet/en/pdf/typ_FPG4.pdf, CompType="Fuse Holder", LatestRevisionDate=2016-05-10, MountType=TH, PackageReference="Fuse Holder for 5x20mm", PartNumber=3101.0040, Publisher="Texas Instruments", RoHS=Y, Supplier 1=Digi-Key, Supplier 2=Mouser, Supplier 3=Farnell, Supplier Part Number 2=693-3101.0040, Supplier Part Number 3=1222690, SymbolCreator=a0799628, SymbolVersion=2014-05-01
H1 H2 H3 H4: library part 6399BG, "AAVID THERMALLOY         6399BG            Heat Sink, TO-220/218, TO-220, 3.3 C/W, 50 mm, 41.91 mm, 25.4 mm", Case/Package=TO-220, Color=Black, Manufacturer="Aavid Thermalloy", Natural Thermal Resistance=3.3°C/W, Package Quantity=250, Supplier Part Number 1=HS528-ND, Category="Heat Sinks", ComponentLink1Description=https://datasheet.ciiva.com/26826/getdatasheetpartid-556672-26826808.pdf?src-supplier=Verical, ComponentLink1URL=https://datasheet.ciiva.com/26826/getdatasheetpartid-556672-26826808.pdf?src-supplier=Verical, ComponentLink2Description=https://datasheet.ciiva.com/16401/aavid20thermalloy206399bg-16401195.pdf?src-supplier=Future+Electronics, ComponentLink2URL=https://datasheet.ciiva.com/16401/aavid20thermalloy206399bg-16401195.pdf?src-supplier=Future+Electronics, Depth=25.4mm, Finish=Anodized, Height=50.8mm, Lead Free="Lead Free", Length=41.91mm, Manufacturer Part Number=6399BG, Material=Anodized, Pricing 1="1=6,20000, 10=6,02800, 25=5,69320, 50=5,35840, 100=5,02350, 250=4,68860, 500=4,35370, 1000=4,26998, 5000=4,18625 (USD)", Radiation Hardening=No, REACH SVHC="No SVHC", RoHS=Yes, RoHS Compliant=Yes, Stock 1=1442, Supplier 1=Digi-Key, Type=Passive, Width=41.91mm
H5 H6 H7 H8 H9 H10: library part CMP-0003640-1, "Standoff, Hex,25mm Length, M3, Aluminum", Manufacturer=Keystone, Supplier Part Number 1=36-24438-ND, ComponentLink1Description="Datasheet Link", ComponentLink1URL=http://www.keyelco.com/userAssets/file/M60-2p72.pdf, CompType=Hardware, Key=24438, LatestRevisionDate=2017-03-09, MountType=TH, PackageReference="Standoff M3", PartNumber=24438, Publisher="Texas Instruments", RoHS=Y, Supplier 1=Digi-Key, Supplier 2=Mouser, Supplier Part Number 2=534-24438
H11 H12 H13 H14 H15 H16: library part CMP-0003646-1, "MACHINE SCREW PAN PHILLIPS M3 5mm", Manufacturer="B&F Fastener Supply", Supplier Part Number 1=H742-ND, ClassName=Screw, ComponentLink1Description="Datasheet Link", ComponentLink1URL=http://www.fasnetdirect.com/refguide/MetD7985a.pdf, CompType=Hardware, Key="MPMS 003 0005 PH", LatestRevisionDate=2017-03-09, MountType=N/A, PackageReference="Screw M3 Phillips head", PartNumber="MPMS 003 0005 PH", Publisher="Texas Instruments", RoHS=Y, Supplier 1=Digi-Key
J1 J2 J3 J4: library part 62409-1, "Quick Disconnect Terminal M 15.8mm 7.5mm Tin Over Copper Automotive Bag", Manufacturer="AMP - TE CONNECTIVITY", Supplier Part Number 1=A24742-ND, ComponentLink1Description=http://www.farnell.com/datasheets/1650963.pdf?src-supplier=Farnell, ComponentLink1URL=http://www.farnell.com/datasheets/1650963.pdf?src-supplier=Farnell, ComponentLink2Description=http://www.farnell.com/datasheets/1650963.pdf?src-supplier=Element14, ComponentLink2URL=http://www.farnell.com/datasheets/1650963.pdf?src-supplier=Element14, ComponentLink3Description=http://www.farnell.com/datasheets/1650963.pdf?src-supplier=Newark, ComponentLink3URL=http://www.farnell.com/datasheets/1650963.pdf?src-supplier=Newark, ComponentLink4Description=https://www.te.com/commerce/DocumentDelivery/DDEController?Action=srchrtrv&DocNm=62409&DocType=Customer+Drawing&DocLang=English&src-supplier=Digi-Key, ComponentLink4URL=https://www.te.com/commerce/DocumentDelivery/DDEController?Action=srchrtrv&DocNm=62409&DocType=Customer+Drawing&DocLang=English&src-supplier=Digi-Key, Manufacturer Part Number=62409-1, Pricing 1="1=0,19000, 10=0,17800, 25=0,15200, 50=0,13320, 100=0,12360, 250=0,10936, 750=0,09035, 1500=0,08083, 8000=0,06895 (USD)", RoHS=No, Stock 1=8729, Supplier 1=Digi-Key